# EAGLE board Battery_Block-GiantPanel-v10 (EAGLE 6.6.0), part 1 of 11
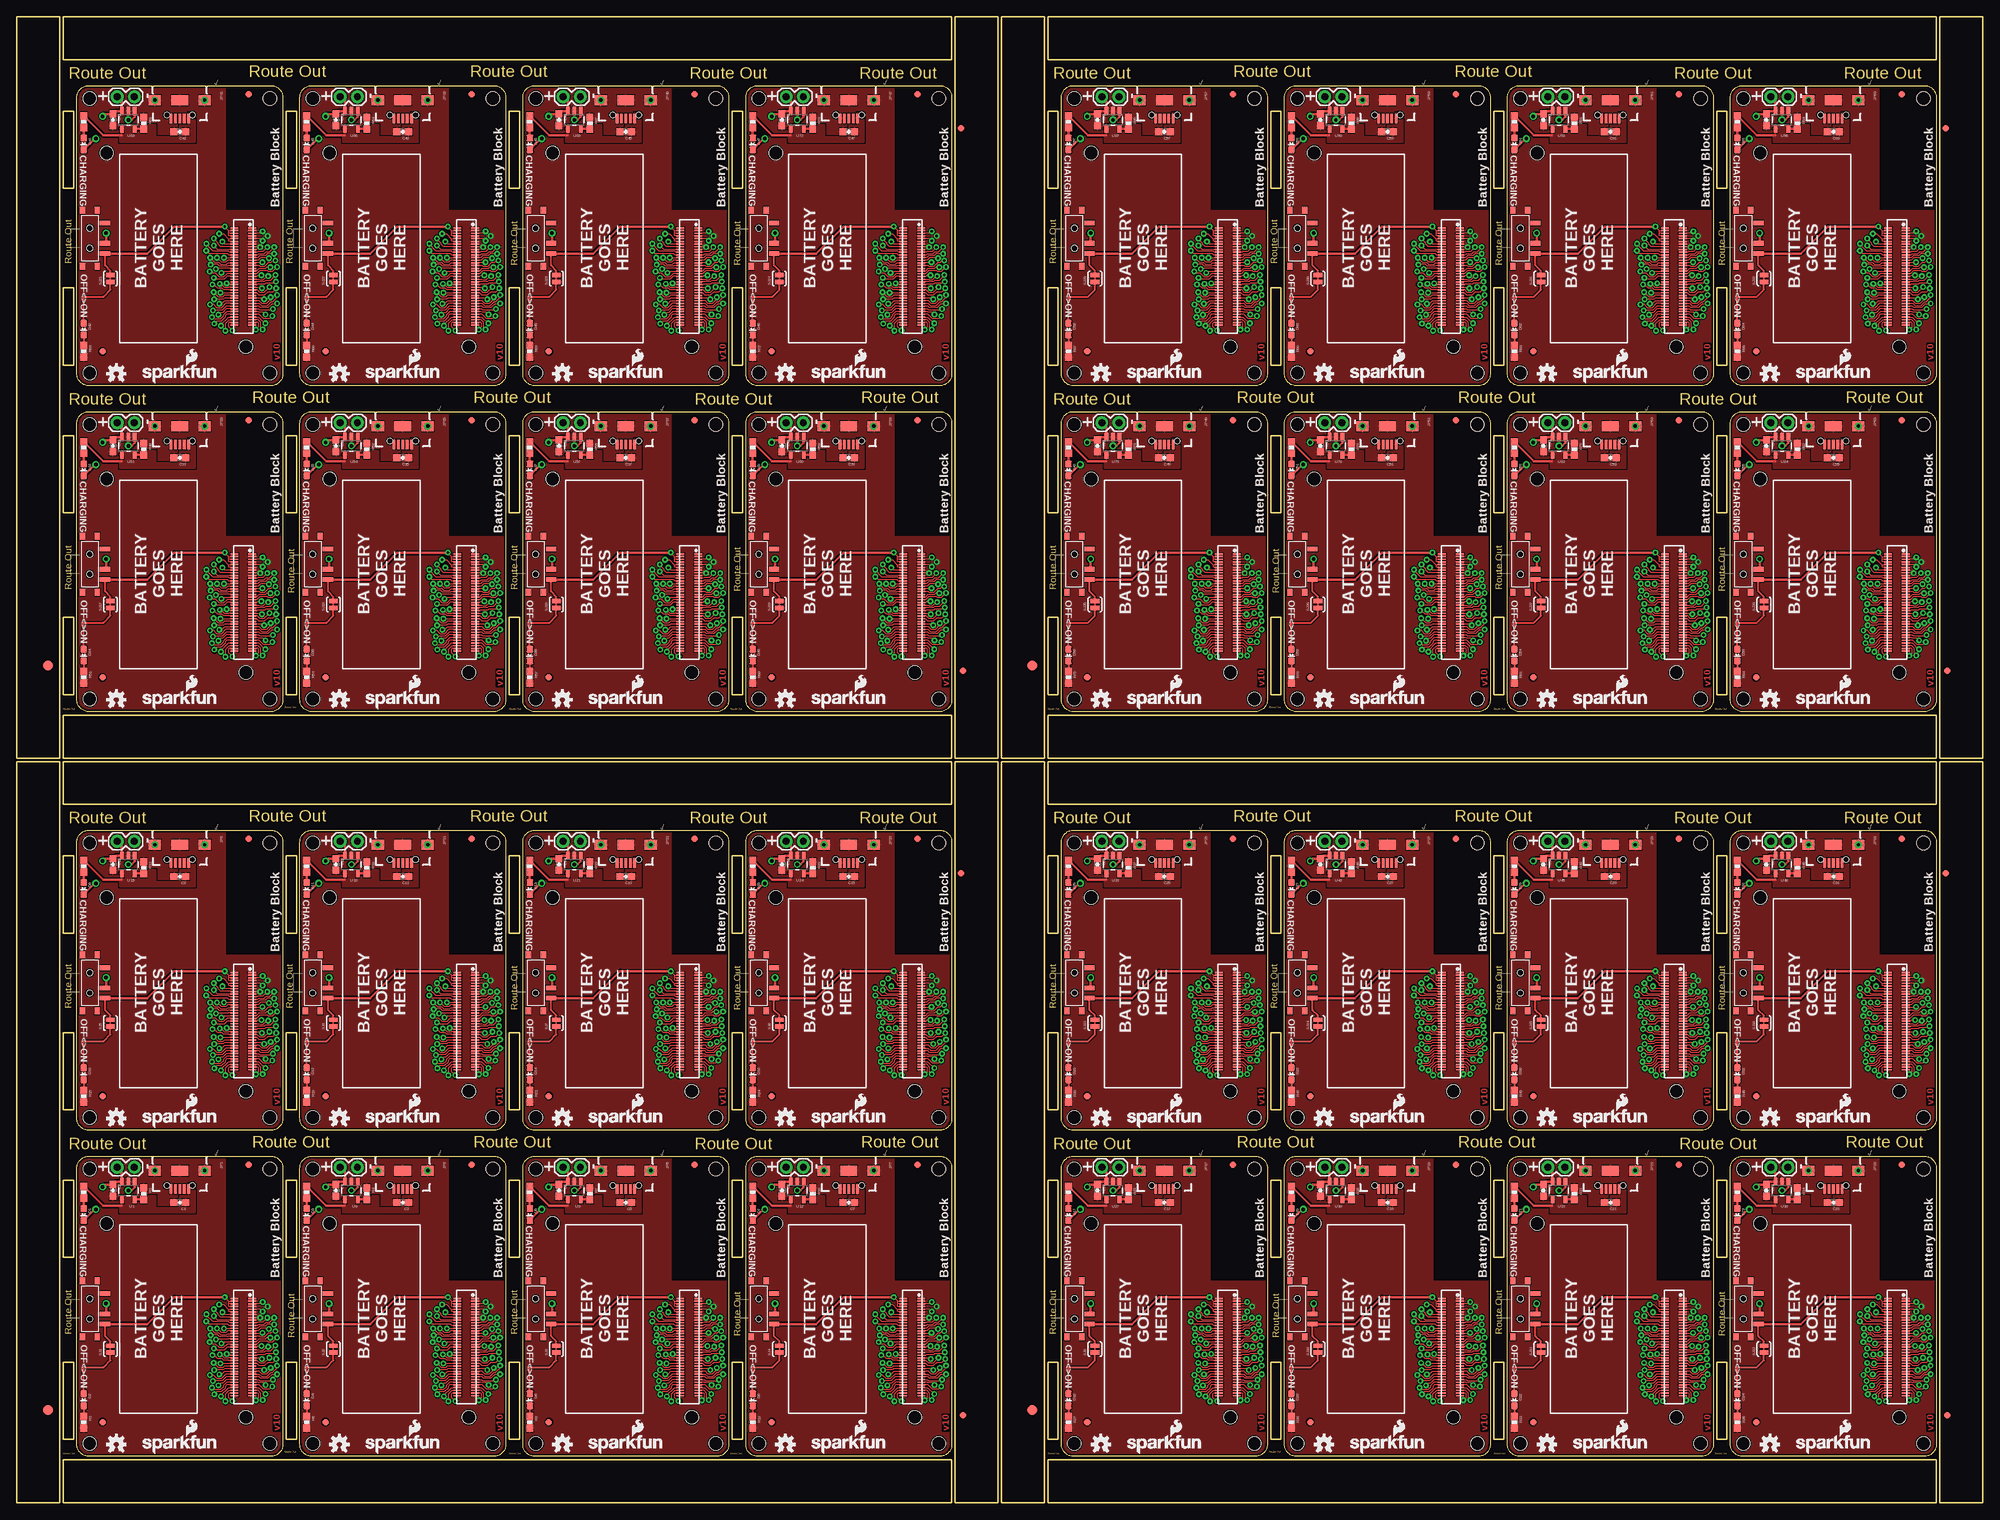
[diagram p0: board, top side]
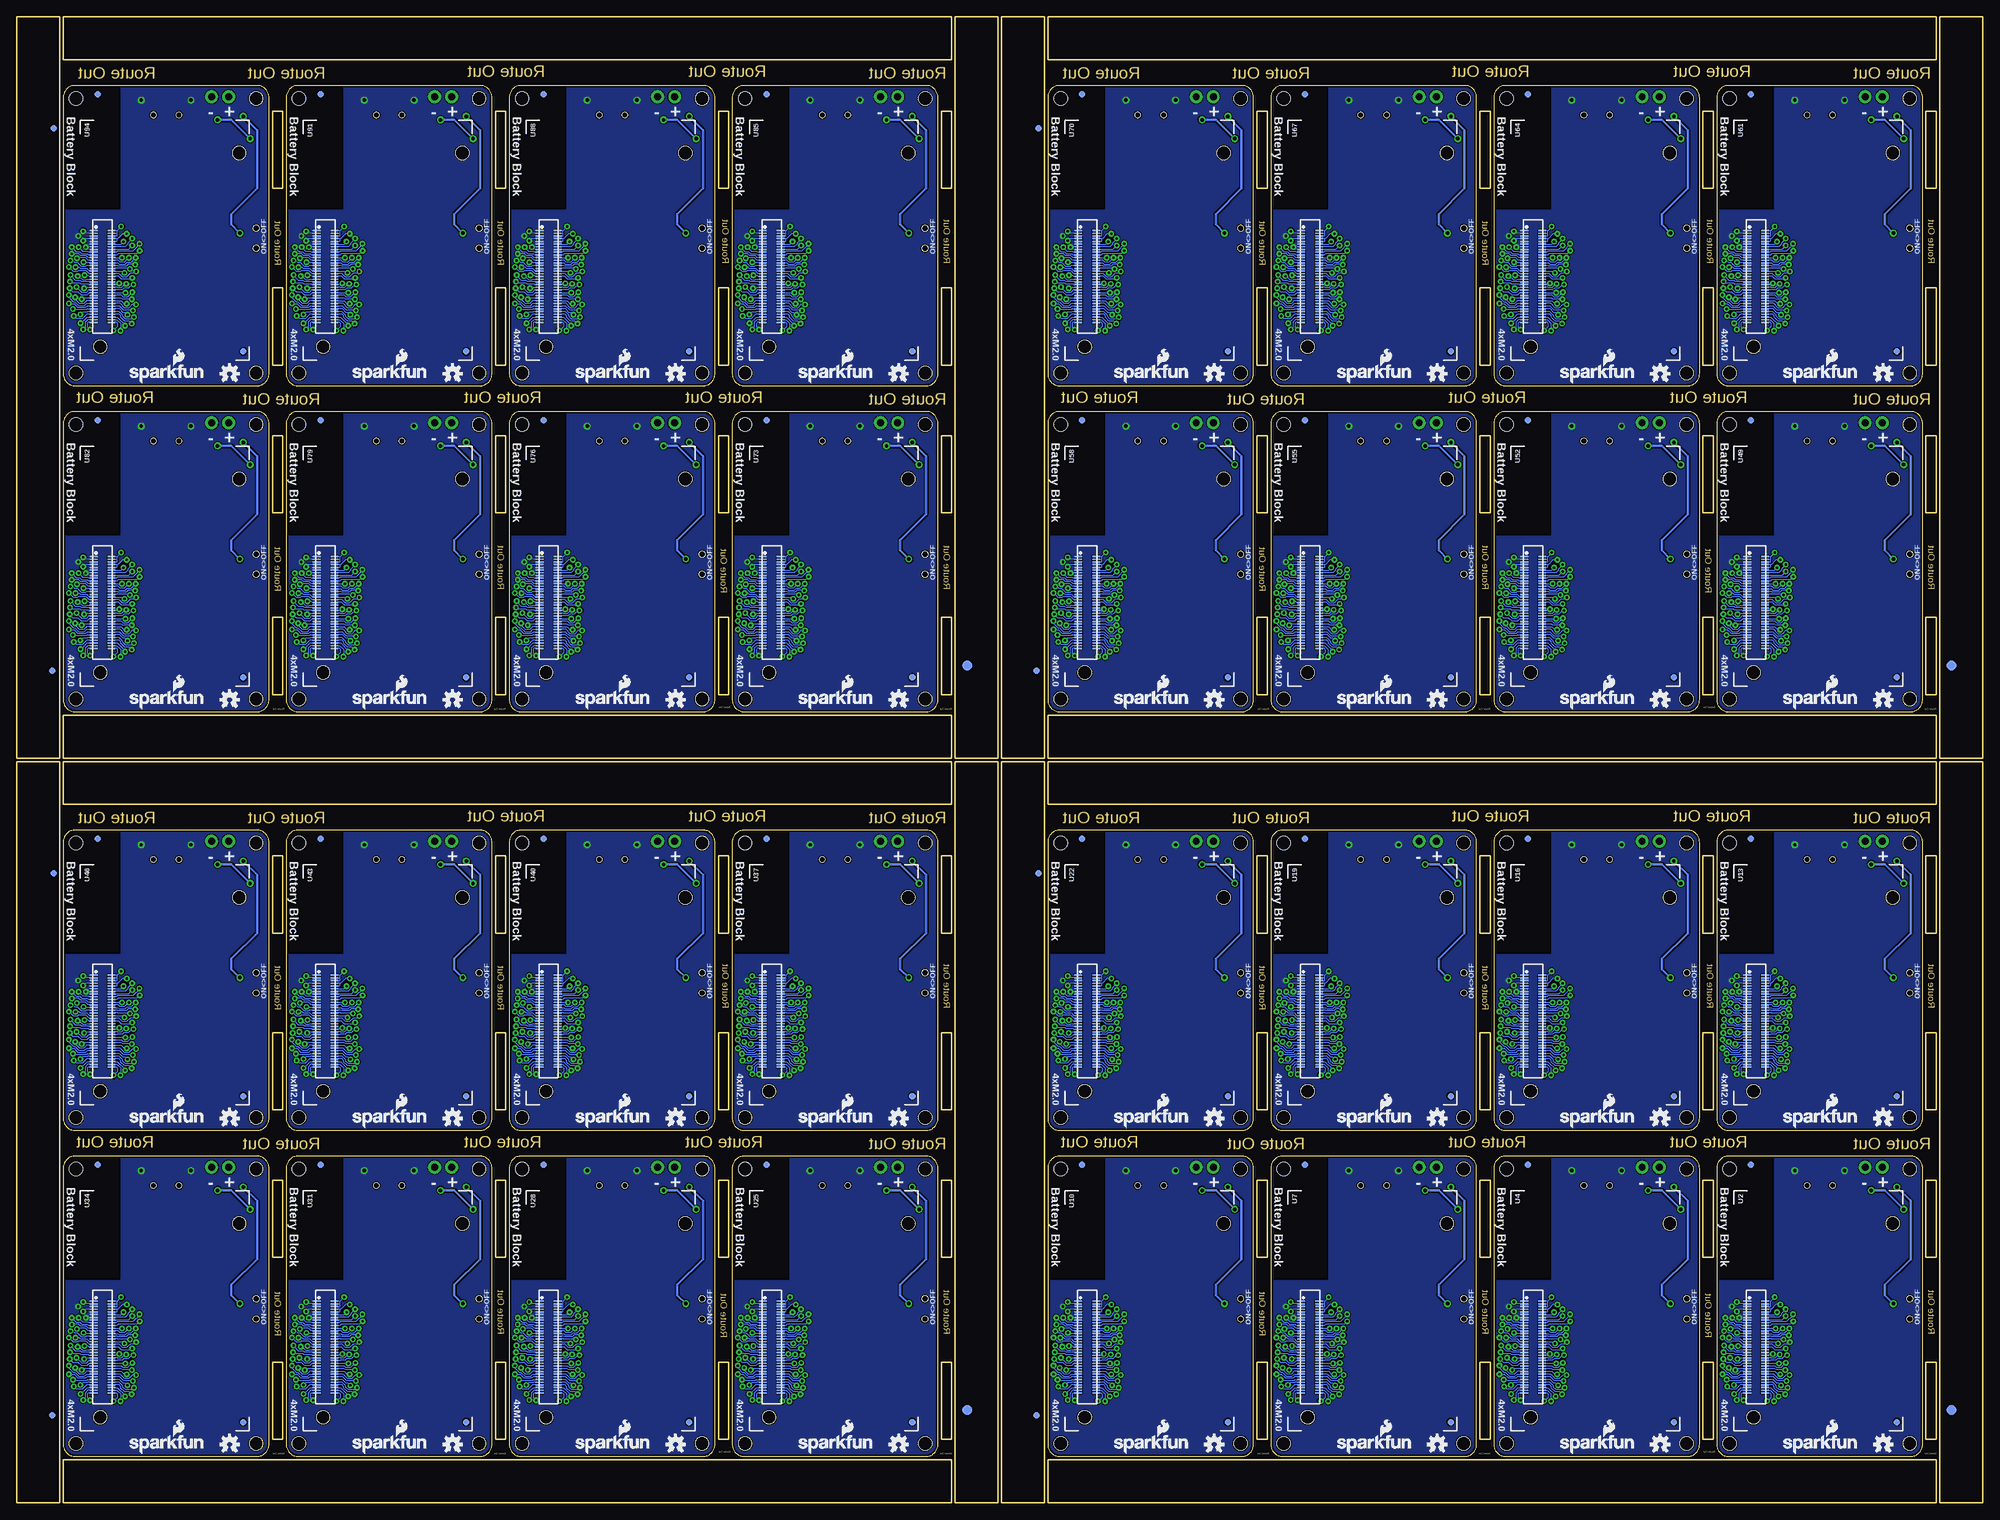
[diagram p1: board, bottom side, seen from below]

Size 291.08 x 219.96 mm. Coordinates in mm from the lower left corner, seen from the top.
Outline: 584 segments
Copper layers (1*16): Top 0.035mm / dielectric 1.5mm / Bottom 0.035mm
Design rules "SparkFun-2-layer *": minimum track width 6mil, minimum drill 13mil, track to track 6mil, track to pad 6mil, pad to pad 6mil, via to via 6mil, smd to smd 6mil, copper to edge 8mil, drill to drill 8mil, minimum pad ring 12mil, minimum via ring 10mil, stop-mask expansion 4mil, vias tented up to drill 20mil, thermal gap 6mil
Holes 2 mm at 37.47,8.76 10.79,8.76 10.79,49.4 37.47,49.4 70.48,8.76 43.81,8.76 43.81,49.4 70.48,49.4 103.5,8.76 76.83,8.76 76.83,49.4 103.5,49.4 136.53,8.76 109.86,8.76 109.86,49.4 136.53,49.4 37.47,57.02 10.79,57.02 10.79,97.66 37.47,97.66 70.48,57.02 43.81,57.02 43.81,97.66 70.48,97.66 103.5,57.02 76.83,57.02 76.83,97.66 103.5,97.66 136.53,57.02 109.86,57.02 109.86,97.66 136.53,97.66 183.26,8.76 156.59,8.76 156.59,49.4 183.26,49.4 216.28,8.76 189.61,8.76 189.61,49.4 216.28,49.4 249.3,8.76 222.63,8.76 222.63,49.4 249.3,49.4 282.32,8.76 255.65,8.76 255.65,49.4 282.32,49.4 183.26,57.02 156.59,57.02 156.59,97.66 183.26,97.66 216.28,57.02 189.61,57.02 189.61,97.66 216.28,97.66 249.3,57.02 222.63,57.02 222.63,97.66 249.3,97.66 282.32,57.02 255.65,57.02 255.65,97.66 282.32,97.66 37.47,119 10.79,119 10.79,159.64 37.47,159.64 70.48,119 43.81,119 43.81,159.64 70.48,159.64 103.5,119 76.83,119 76.83,159.64 103.5,159.64 136.53,119 109.86,119 109.86,159.64 136.53,159.64 37.47,167.26 10.79,167.26 10.79,207.9 37.47,207.9 70.48,167.26 43.81,167.26 43.81,207.9 70.48,207.9 103.5,167.26 76.83,167.26 76.83,207.9 103.5,207.9 136.53,167.26 109.86,167.26 109.86,207.9 136.53,207.9 183.26,119 156.59,119 156.59,159.64 183.26,159.64 216.28,119 189.61,119 189.61,159.64 216.28,159.64 249.3,119 222.63,119 222.63,159.64 249.3,159.64 282.32,119 255.65,119 255.65,159.64 282.32,159.64 183.26,167.26 156.59,167.26 156.59,207.9 183.26,207.9 216.28,167.26 189.61,167.26 189.61,207.9 216.28,207.9 249.3,167.26 222.63,167.26 222.63,207.9 249.3,207.9 282.32,167.26 255.65,167.26 255.65,207.9 282.32,207.9
tRestrict: area 31,33 to 39.4,51.3; area 64,33 to 72.4,51.3; area 97,33 to 105.4,51.3; area 130,33 to 138.4,51.3; area 31,81.3 to 39.4,99.6; area 64,81.3 to 72.4,99.6; area 97,81.3 to 105.4,99.6; area 130,81.3 to 138.4,99.6; area 176.8,33 to 185.2,51.3; area 209.8,33 to 218.2,51.3; area 242.8,33 to 251.2,51.3; area 275.8,33 to 284.2,51.3; 20 more areas
bRestrict: area 31,33 to 39.4,51.3; area 64,33 to 72.4,51.3; area 97,33 to 105.4,51.3; area 130,33 to 138.4,51.3; area 31,81.3 to 39.4,99.6; area 64,81.3 to 72.4,99.6; area 97,81.3 to 105.4,99.6; area 130,81.3 to 138.4,99.6; area 176.8,33 to 185.2,51.3; area 209.8,33 to 218.2,51.3; area 242.8,33 to 251.2,51.3; area 275.8,33 to 284.2,51.3; 20 more areas

## Footprints (pad centres in the part's own frame; a part is rotated, then mirrored left to right if it is on the bottom)
0603-CAP = smd 1.1 x 1: 1 -0.85,0; 2 0.85,0
LED-0603 = smd 1 x 1: A 0,-0.877; C 0,0.877
FIDUCIAL-1.5X3 = smd 1.5 x 1.5: 1 0,0
FIDUCIAL-1X2 = smd 1 x 1: 1 0,0
USB-B-MICRO-SMD_V03 = smd 1.4 x 0.4: D+1 2.7,0; D-1 2.7,0.65; GND1 2.7,-1.3; ID1 2.7,-0.65; VBUS1 2.7,1.3 | smd 1.5 x 1.8: SHIELD1 0,3.7; SHIELD2 0,-3.7 | smd 1.5 x 2.5: SHIELD3 0,0 | hole 0.85: 2.2,1.9; 2.2,-1.9
1X02 = drill 1.016 pad 1.88: 1 0,0; 2 2.54,0
0603-RES = smd 1.1 x 1: 1 -0.85,0; 2 0.85,0
PAD-JUMPER-2-NC_BY_TRACE_YES_SILK = smd 0.635 x 1.27: 1 -0.508,0; 2 0.508,0
KPS-1290 = smd 0.7 x 1.5: O -2.25,2.25; P 0.75,2.25; S 2.25,2.25 | smd 1 x 0.8: P$1 -4.15,1.1; P$2 -4.15,-1.1; P$3 4.15,-1.1; P$4 4.15,1.1 | hole 0.9: -1.5,0; 1.5,0
SOT23-5 = smd 0.55 x 1.2: 1 -0.95,-1.3; 2 0,-1.3; 3 0.95,-1.3; 4 0.95,1.3; 5 -0.95,1.3
EDISON_DAUGHTER = smd 1.14 x 0.2: 1 1.98,19.17; 2 4.62,19.17; 3 1.98,18.77; 4 4.62,18.77; 5 1.98,18.37; 6 4.62,18.37; 7 1.98,17.97; 8 4.62,17.97; 9 1.98,17.57; 10 4.62,17.57; 11 1.98,17.17; 12 4.62,17.17; 13 1.98,16.77; 14 4.62,16.77; 15 1.98,16.37; 16 4.62,16.37; 17 1.98,15.97; 18 4.62,15.97; 19 1.98,15.57; 20 4.62,15.57; 21 1.98,15.17; 22 4.62,15.17; 23 1.98,14.77; 24 4.62,14.77; 25 1.98,14.37; 26 4.62,14.37; 27 1.98,13.97; 28 4.62,13.97; 29 1.98,13.57; 30 4.62,13.57; 31 1.98,13.17; 32 4.62,13.17; 33 1.98,12.77; 34 4.62,12.77; 35 1.98,12.37; 36 4.62,12.37; 37 1.98,11.97; 38 4.62,11.97; 39 1.98,11.57; 40 4.62,11.57; 41 1.98,11.17; 42 4.62,11.17; 43 1.98,10.77; 44 4.62,10.77; 45 1.98,10.37; 46 4.62,10.37; 47 1.98,9.97; 48 4.62,9.97; 49 1.98,9.57; 50 4.62,9.57; 51 1.98,9.17; 52 4.62,9.17; 53 1.98,8.77; 54 4.62,8.77; 55 1.98,8.37; 56 4.62,8.37; 57 1.98,7.97; 58 4.62,7.97; 59 1.98,7.57; 60 4.62,7.57; 61 1.98,7.17; 62 4.62,7.17; 63 1.98,6.77; 64 4.62,6.77; 65 1.98,6.37; 66 4.62,6.37; 67 1.98,5.97; 68 4.62,5.97; 69 1.98,5.57; 70 4.62,5.57 | hole 2: 23.53,30.67; 2.93,1.98
DF40C-70DP-0.4(51) = smd 0.2 x 1.14 bottom: 1 6.8,1.32; 2 6.8,-1.32; 3 6.4,1.32; 4 6.4,-1.32; 5 6,1.32; 6 6,-1.32; 7 5.6,1.32; 8 5.6,-1.32; 9 5.2,1.32; 10 5.2,-1.32; 11 4.8,1.32; 12 4.8,-1.32; 13 4.4,1.32; 14 4.4,-1.32; 15 4,1.32; 16 4,-1.32; 17 3.6,1.32; 18 3.6,-1.32; 19 3.2,1.32; 20 3.2,-1.32; 21 2.8,1.32; 22 2.8,-1.32; 23 2.4,1.32; 24 2.4,-1.32; 25 2,1.32; 26 2,-1.32; 27 1.6,1.32; 28 1.6,-1.32; 29 1.2,1.32; 30 1.2,-1.32; 31 0.8,1.32; 32 0.8,-1.32; 33 0.4,1.32; 34 0.4,-1.32; 35 0,1.32; 36 0,-1.32; 37 -0.4,1.32; 38 -0.4,-1.32; 39 -0.8,1.32; 40 -0.8,-1.32; 41 -1.2,1.32; 42 -1.2,-1.32; 43 -1.6,1.32; 44 -1.6,-1.32; 45 -2,1.32; 46 -2,-1.32; 47 -2.4,1.32; 48 -2.4,-1.32; 49 -2.8,1.32; 50 -2.8,-1.32; 51 -3.2,1.32; 52 -3.2,-1.32; 53 -3.6,1.32; 54 -3.6,-1.32; 55 -4,1.32; 56 -4,-1.32; 57 -4.4,1.32; 58 -4.4,-1.32; 59 -4.8,1.32; 60 -4.8,-1.32; 61 -5.2,1.32; 62 -5.2,-1.32; 63 -5.6,1.32; 64 -5.6,-1.32; 65 -6,1.32; 66 -6,-1.32; 67 -6.4,1.32; 68 -6.4,-1.32; 69 -6.8,1.32; 70 -6.8,-1.32; NC1 7.2,1.32; NC2 7.2,-1.32; NC3 -7.2,-1.32; NC4 -7.2,1.32

## Placement (x,y rotation side)
C1  4.7uF  [0603-CAP]  24.13,44.45 180 top
C2  4.7uF  [0603-CAP]  14.22,46.23 270 top
C3  4.7uF  [0603-CAP]  57.15,44.45 180 top
C4  4.7uF  [0603-CAP]  47.24,46.23 270 top
C5  4.7uF  [0603-CAP]  90.17,44.45 180 top
C6  4.7uF  [0603-CAP]  80.26,46.23 270 top
C7  4.7uF  [0603-CAP]  123.19,44.45 180 top
C8  4.7uF  [0603-CAP]  113.28,46.23 270 top
C9  4.7uF  [0603-CAP]  24.13,92.71 180 top
C10  4.7uF  [0603-CAP]  14.22,94.49 270 top
C11  4.7uF  [0603-CAP]  57.15,92.71 180 top
C12  4.7uF  [0603-CAP]  47.24,94.49 270 top
C13  4.7uF  [0603-CAP]  90.17,92.71 180 top
C14  4.7uF  [0603-CAP]  80.26,94.49 270 top
C15  4.7uF  [0603-CAP]  123.19,92.71 180 top
C16  4.7uF  [0603-CAP]  113.28,94.49 270 top
C17  4.7uF  [0603-CAP]  169.93,44.45 180 top
C18  4.7uF  [0603-CAP]  160.02,46.23 270 top
C19  4.7uF  [0603-CAP]  202.95,44.45 180 top
C20  4.7uF  [0603-CAP]  193.04,46.23 270 top
C21  4.7uF  [0603-CAP]  235.97,44.45 180 top
C22  4.7uF  [0603-CAP]  226.06,46.23 270 top
C23  4.7uF  [0603-CAP]  268.99,44.45 180 top
C24  4.7uF  [0603-CAP]  259.08,46.23 270 top
C25  4.7uF  [0603-CAP]  169.93,92.71 180 top
C26  4.7uF  [0603-CAP]  160.02,94.49 270 top
C27  4.7uF  [0603-CAP]  202.95,92.71 180 top
C28  4.7uF  [0603-CAP]  193.04,94.49 270 top
C29  4.7uF  [0603-CAP]  235.97,92.71 180 top
C30  4.7uF  [0603-CAP]  226.06,94.49 270 top
C31  4.7uF  [0603-CAP]  268.99,92.71 180 top
C32  4.7uF  [0603-CAP]  259.08,94.49 270 top
C33  4.7uF  [0603-CAP]  24.13,154.69 180 top
C34  4.7uF  [0603-CAP]  14.22,156.46 270 top
C35  4.7uF  [0603-CAP]  57.15,154.69 180 top
C36  4.7uF  [0603-CAP]  47.24,156.46 270 top
C37  4.7uF  [0603-CAP]  90.17,154.69 180 top
C38  4.7uF  [0603-CAP]  80.26,156.46 270 top
C39  4.7uF  [0603-CAP]  123.19,154.69 180 top
C40  4.7uF  [0603-CAP]  113.28,156.46 270 top
C41  4.7uF  [0603-CAP]  24.13,202.95 180 top
C42  4.7uF  [0603-CAP]  14.22,204.72 270 top
C43  4.7uF  [0603-CAP]  57.15,202.95 180 top
C44  4.7uF  [0603-CAP]  47.24,204.72 270 top
C45  4.7uF  [0603-CAP]  90.17,202.95 180 top
C46  4.7uF  [0603-CAP]  80.26,204.72 270 top
C47  4.7uF  [0603-CAP]  123.19,202.95 180 top
C48  4.7uF  [0603-CAP]  113.28,204.72 270 top
C49  4.7uF  [0603-CAP]  169.93,154.69 180 top
C50  4.7uF  [0603-CAP]  160.02,156.46 270 top
C51  4.7uF  [0603-CAP]  202.95,154.69 180 top
C52  4.7uF  [0603-CAP]  193.04,156.46 270 top
C53  4.7uF  [0603-CAP]  235.97,154.69 180 top
C54  4.7uF  [0603-CAP]  226.06,156.46 270 top
C55  4.7uF  [0603-CAP]  268.99,154.69 180 top
C56  4.7uF  [0603-CAP]  259.08,156.46 270 top
C57  4.7uF  [0603-CAP]  169.93,202.95 180 top
C58  4.7uF  [0603-CAP]  160.02,204.72 270 top
C59  4.7uF  [0603-CAP]  202.95,202.95 180 top
C60  4.7uF  [0603-CAP]  193.04,204.72 270 top
C61  4.7uF  [0603-CAP]  235.97,202.95 180 top
C62  4.7uF  [0603-CAP]  226.06,204.72 270 top
C63  4.7uF  [0603-CAP]  268.99,202.95 180 top
C64  4.7uF  [0603-CAP]  259.08,204.72 270 top
D1  RED  [LED-0603]  9.91,42.67 180 top
D2  BLUE  [LED-0603]  9.91,15.24 180 top
D3  RED  [LED-0603]  42.93,42.67 180 top
D4  BLUE  [LED-0603]  42.93,15.24 180 top
D5  RED  [LED-0603]  75.95,42.67 180 top
D6  BLUE  [LED-0603]  75.95,15.24 180 top
D7  RED  [LED-0603]  108.97,42.67 180 top
D8  BLUE  [LED-0603]  108.97,15.24 180 top
D9  RED  [LED-0603]  9.91,90.93 180 top
D10  BLUE  [LED-0603]  9.91,63.5 180 top
D11  RED  [LED-0603]  42.93,90.93 180 top
D12  BLUE  [LED-0603]  42.93,63.5 180 top
D13  RED  [LED-0603]  75.95,90.93 180 top
D14  BLUE  [LED-0603]  75.95,63.5 180 top
D15  RED  [LED-0603]  108.97,90.93 180 top
D16  BLUE  [LED-0603]  108.97,63.5 180 top
D17  RED  [LED-0603]  155.7,42.67 180 top
D18  BLUE  [LED-0603]  155.7,15.24 180 top
D19  RED  [LED-0603]  188.72,42.67 180 top
D20  BLUE  [LED-0603]  188.72,15.24 180 top
D21  RED  [LED-0603]  221.74,42.67 180 top
D22  BLUE  [LED-0603]  221.74,15.24 180 top
D23  RED  [LED-0603]  254.76,42.67 180 top
D24  BLUE  [LED-0603]  254.76,15.24 180 top
D25  RED  [LED-0603]  155.7,90.93 180 top
D26  BLUE  [LED-0603]  155.7,63.5 180 top
D27  RED  [LED-0603]  188.72,90.93 180 top
D28  BLUE  [LED-0603]  188.72,63.5 180 top
D29  RED  [LED-0603]  221.74,90.93 180 top
D30  BLUE  [LED-0603]  221.74,63.5 180 top
D31  RED  [LED-0603]  254.76,90.93 180 top
D32  BLUE  [LED-0603]  254.76,63.5 180 top
D33  RED  [LED-0603]  9.91,152.91 180 top
D34  BLUE  [LED-0603]  9.91,125.48 180 top
D35  RED  [LED-0603]  42.93,152.91 180 top
D36  BLUE  [LED-0603]  42.93,125.48 180 top
D37  RED  [LED-0603]  75.95,152.91 180 top
D38  BLUE  [LED-0603]  75.95,125.48 180 top
D39  RED  [LED-0603]  108.97,152.91 180 top
D40  BLUE  [LED-0603]  108.97,125.48 180 top
D41  RED  [LED-0603]  9.91,201.17 180 top
D42  BLUE  [LED-0603]  9.91,173.74 180 top
D43  RED  [LED-0603]  42.93,201.17 180 top
D44  BLUE  [LED-0603]  42.93,173.74 180 top
D45  RED  [LED-0603]  75.95,201.17 180 top
D46  BLUE  [LED-0603]  75.95,173.74 180 top
D47  RED  [LED-0603]  108.97,201.17 180 top
D48  BLUE  [LED-0603]  108.97,173.74 180 top
D49  RED  [LED-0603]  155.7,152.91 180 top
D50  BLUE  [LED-0603]  155.7,125.48 180 top
D51  RED  [LED-0603]  188.72,152.91 180 top
D52  BLUE  [LED-0603]  188.72,125.48 180 top
D53  RED  [LED-0603]  221.74,152.91 180 top
D54  BLUE  [LED-0603]  221.74,125.48 180 top
D55  RED  [LED-0603]  254.76,152.91 180 top
D56  BLUE  [LED-0603]  254.76,125.48 180 top
D57  RED  [LED-0603]  155.7,201.17 180 top
D58  BLUE  [LED-0603]  155.7,173.74 180 top
D59  RED  [LED-0603]  188.72,201.17 180 top
D60  BLUE  [LED-0603]  188.72,173.74 180 top
D61  RED  [LED-0603]  221.74,201.17 180 top
D62  BLUE  [LED-0603]  221.74,173.74 180 top
D63  RED  [LED-0603]  254.76,201.17 180 top
D64  BLUE  [LED-0603]  254.76,173.74 180 top
E$1  [FIDUCIAL-1.5X3]  4.57,13.72 0 top
E$2  [FIDUCIAL-1.5X3]  4.57,13.72 0 bottom
E$3  [FIDUCIAL-1X2]  140.08,12.95 0 bottom
E$4  [FIDUCIAL-1X2]  140.08,12.95 0 top
E$5  [FIDUCIAL-1X2]  139.83,93.22 180 top
E$6  [FIDUCIAL-1X2]  139.83,93.22 180 bottom
E$7  [FIDUCIAL-1X2]  285.88,12.95 0 top
E$8  [FIDUCIAL-1X2]  285.62,93.22 180 top
E$9  [FIDUCIAL-1.5X3]  150.37,13.72 0 top
E$10  [FIDUCIAL-1.5X3]  150.37,13.72 0 bottom
E$11  [FIDUCIAL-1X2]  285.88,12.95 0 bottom
E$12  [FIDUCIAL-1X2]  285.62,93.22 180 bottom
E$13  [FIDUCIAL-1X2]  140.08,123.19 0 top
E$14  [FIDUCIAL-1X2]  139.83,203.45 180 top
E$15  [FIDUCIAL-1.5X3]  4.57,123.95 0 top
E$16  [FIDUCIAL-1.5X3]  4.57,123.95 0 bottom
E$17  [FIDUCIAL-1X2]  140.08,123.19 0 bottom
E$18  [FIDUCIAL-1X2]  139.83,203.45 180 bottom
E$19  [FIDUCIAL-1X2]  285.88,123.19 0 top
E$20  [FIDUCIAL-1X2]  285.62,203.45 180 top
E$21  [FIDUCIAL-1.5X3]  150.37,123.95 0 top
E$22  [FIDUCIAL-1.5X3]  150.37,123.95 0 bottom
E$23  [FIDUCIAL-1X2]  285.88,123.19 0 bottom
E$24  [FIDUCIAL-1X2]  285.62,203.45 180 bottom
FID1  FIDUCIAL1X2  [FIDUCIAL-1X2]  12.7,11.94 0 top
FID2  FIDUCIAL1X2  [FIDUCIAL-1X2]  34.29,50.04 0 top
FID3  FIDUCIAL1X2  [FIDUCIAL-1X2]  12.7,11.94 0 bottom
FID4  FIDUCIAL1X2  [FIDUCIAL-1X2]  34.29,50.04 0 bottom
FID5  FIDUCIAL1X2  [FIDUCIAL-1X2]  45.72,11.94 0 top
FID6  FIDUCIAL1X2  [FIDUCIAL-1X2]  67.31,50.04 0 top
FID7  FIDUCIAL1X2  [FIDUCIAL-1X2]  45.72,11.94 0 bottom
FID8  FIDUCIAL1X2  [FIDUCIAL-1X2]  67.31,50.04 0 bottom
FID9  FIDUCIAL1X2  [FIDUCIAL-1X2]  78.74,11.94 0 top
FID10  FIDUCIAL1X2  [FIDUCIAL-1X2]  100.33,50.04 0 top
FID11  FIDUCIAL1X2  [FIDUCIAL-1X2]  78.74,11.94 0 bottom
FID12  FIDUCIAL1X2  [FIDUCIAL-1X2]  100.33,50.04 0 bottom
FID13  FIDUCIAL1X2  [FIDUCIAL-1X2]  111.76,11.94 0 top
FID14  FIDUCIAL1X2  [FIDUCIAL-1X2]  133.35,50.04 0 top
FID15  FIDUCIAL1X2  [FIDUCIAL-1X2]  111.76,11.94 0 bottom
FID16  FIDUCIAL1X2  [FIDUCIAL-1X2]  133.35,50.04 0 bottom
FID17  FIDUCIAL1X2  [FIDUCIAL-1X2]  12.7,60.2 0 top
FID18  FIDUCIAL1X2  [FIDUCIAL-1X2]  34.29,98.3 0 top
FID19  FIDUCIAL1X2  [FIDUCIAL-1X2]  12.7,60.2 0 bottom
FID20  FIDUCIAL1X2  [FIDUCIAL-1X2]  34.29,98.3 0 bottom
FID21  FIDUCIAL1X2  [FIDUCIAL-1X2]  45.72,60.2 0 top
FID22  FIDUCIAL1X2  [FIDUCIAL-1X2]  67.31,98.3 0 top
FID23  FIDUCIAL1X2  [FIDUCIAL-1X2]  45.72,60.2 0 bottom
FID24  FIDUCIAL1X2  [FIDUCIAL-1X2]  67.31,98.3 0 bottom
FID25  FIDUCIAL1X2  [FIDUCIAL-1X2]  78.74,60.2 0 top
FID26  FIDUCIAL1X2  [FIDUCIAL-1X2]  100.33,98.3 0 top
FID27  FIDUCIAL1X2  [FIDUCIAL-1X2]  78.74,60.2 0 bottom
FID28  FIDUCIAL1X2  [FIDUCIAL-1X2]  100.33,98.3 0 bottom
FID29  FIDUCIAL1X2  [FIDUCIAL-1X2]  111.76,60.2 0 top
FID30  FIDUCIAL1X2  [FIDUCIAL-1X2]  133.35,98.3 0 top
FID31  FIDUCIAL1X2  [FIDUCIAL-1X2]  111.76,60.2 0 bottom
FID32  FIDUCIAL1X2  [FIDUCIAL-1X2]  133.35,98.3 0 bottom
FID33  FIDUCIAL1X2  [FIDUCIAL-1X2]  158.5,11.94 0 top
FID34  FIDUCIAL1X2  [FIDUCIAL-1X2]  180.09,50.04 0 top
FID35  FIDUCIAL1X2  [FIDUCIAL-1X2]  158.5,11.94 0 bottom
FID36  FIDUCIAL1X2  [FIDUCIAL-1X2]  180.09,50.04 0 bottom
FID37  FIDUCIAL1X2  [FIDUCIAL-1X2]  191.52,11.94 0 top
FID38  FIDUCIAL1X2  [FIDUCIAL-1X2]  213.11,50.04 0 top
FID39  FIDUCIAL1X2  [FIDUCIAL-1X2]  191.52,11.94 0 bottom
FID40  FIDUCIAL1X2  [FIDUCIAL-1X2]  213.11,50.04 0 bottom
FID41  FIDUCIAL1X2  [FIDUCIAL-1X2]  224.54,11.94 0 top
FID42  FIDUCIAL1X2  [FIDUCIAL-1X2]  246.13,50.04 0 top
FID43  FIDUCIAL1X2  [FIDUCIAL-1X2]  224.54,11.94 0 bottom
FID44  FIDUCIAL1X2  [FIDUCIAL-1X2]  246.13,50.04 0 bottom
FID45  FIDUCIAL1X2  [FIDUCIAL-1X2]  257.56,11.94 0 top
FID46  FIDUCIAL1X2  [FIDUCIAL-1X2]  279.15,50.04 0 top
FID47  FIDUCIAL1X2  [FIDUCIAL-1X2]  257.56,11.94 0 bottom
FID48  FIDUCIAL1X2  [FIDUCIAL-1X2]  279.15,50.04 0 bottom
FID49  FIDUCIAL1X2  [FIDUCIAL-1X2]  158.5,60.2 0 top
FID50  FIDUCIAL1X2  [FIDUCIAL-1X2]  180.09,98.3 0 top
FID51  FIDUCIAL1X2  [FIDUCIAL-1X2]  158.5,60.2 0 bottom
FID52  FIDUCIAL1X2  [FIDUCIAL-1X2]  180.09,98.3 0 bottom
FID53  FIDUCIAL1X2  [FIDUCIAL-1X2]  191.52,60.2 0 top
FID54  FIDUCIAL1X2  [FIDUCIAL-1X2]  213.11,98.3 0 top
FID55  FIDUCIAL1X2  [FIDUCIAL-1X2]  191.52,60.2 0 bottom
FID56  FIDUCIAL1X2  [FIDUCIAL-1X2]  213.11,98.3 0 bottom
FID57  FIDUCIAL1X2  [FIDUCIAL-1X2]  224.54,60.2 0 top
FID58  FIDUCIAL1X2  [FIDUCIAL-1X2]  246.13,98.3 0 top
FID59  FIDUCIAL1X2  [FIDUCIAL-1X2]  224.54,60.2 0 bottom
FID60  FIDUCIAL1X2  [FIDUCIAL-1X2]  246.13,98.3 0 bottom
FID61  FIDUCIAL1X2  [FIDUCIAL-1X2]  257.56,60.2 0 top
FID62  FIDUCIAL1X2  [FIDUCIAL-1X2]  279.15,98.3 0 top
FID63  FIDUCIAL1X2  [FIDUCIAL-1X2]  257.56,60.2 0 bottom
FID64  FIDUCIAL1X2  [FIDUCIAL-1X2]  279.15,98.3 0 bottom
FID65  FIDUCIAL1X2  [FIDUCIAL-1X2]  12.7,122.17 0 top
FID66  FIDUCIAL1X2  [FIDUCIAL-1X2]  34.29,160.27 0 top
FID67  FIDUCIAL1X2  [FIDUCIAL-1X2]  12.7,122.17 0 bottom
FID68  FIDUCIAL1X2  [FIDUCIAL-1X2]  34.29,160.27 0 bottom
FID69  FIDUCIAL1X2  [FIDUCIAL-1X2]  45.72,122.17 0 top
FID70  FIDUCIAL1X2  [FIDUCIAL-1X2]  67.31,160.27 0 top
FID71  FIDUCIAL1X2  [FIDUCIAL-1X2]  45.72,122.17 0 bottom
FID72  FIDUCIAL1X2  [FIDUCIAL-1X2]  67.31,160.27 0 bottom
FID73  FIDUCIAL1X2  [FIDUCIAL-1X2]  78.74,122.17 0 top
FID74  FIDUCIAL1X2  [FIDUCIAL-1X2]  100.33,160.27 0 top
FID75  FIDUCIAL1X2  [FIDUCIAL-1X2]  78.74,122.17 0 bottom
FID76  FIDUCIAL1X2  [FIDUCIAL-1X2]  100.33,160.27 0 bottom
FID77  FIDUCIAL1X2  [FIDUCIAL-1X2]  111.76,122.17 0 top
FID78  FIDUCIAL1X2  [FIDUCIAL-1X2]  133.35,160.27 0 top
FID79  FIDUCIAL1X2  [FIDUCIAL-1X2]  111.76,122.17 0 bottom
FID80  FIDUCIAL1X2  [FIDUCIAL-1X2]  133.35,160.27 0 bottom
FID81  FIDUCIAL1X2  [FIDUCIAL-1X2]  12.7,170.43 0 top
FID82  FIDUCIAL1X2  [FIDUCIAL-1X2]  34.29,208.53 0 top
FID83  FIDUCIAL1X2  [FIDUCIAL-1X2]  12.7,170.43 0 bottom
FID84  FIDUCIAL1X2  [FIDUCIAL-1X2]  34.29,208.53 0 bottom
FID85  FIDUCIAL1X2  [FIDUCIAL-1X2]  45.72,170.43 0 top
FID86  FIDUCIAL1X2  [FIDUCIAL-1X2]  67.31,208.53 0 top
FID87  FIDUCIAL1X2  [FIDUCIAL-1X2]  45.72,170.43 0 bottom
FID88  FIDUCIAL1X2  [FIDUCIAL-1X2]  67.31,208.53 0 bottom
FID89  FIDUCIAL1X2  [FIDUCIAL-1X2]  78.74,170.43 0 top
FID90  FIDUCIAL1X2  [FIDUCIAL-1X2]  100.33,208.53 0 top
FID91  FIDUCIAL1X2  [FIDUCIAL-1X2]  78.74,170.43 0 bottom
FID92  FIDUCIAL1X2  [FIDUCIAL-1X2]  100.33,208.53 0 bottom
FID93  FIDUCIAL1X2  [FIDUCIAL-1X2]  111.76,170.43 0 top
FID94  FIDUCIAL1X2  [FIDUCIAL-1X2]  133.35,208.53 0 top
FID95  FIDUCIAL1X2  [FIDUCIAL-1X2]  111.76,170.43 0 bottom
FID96  FIDUCIAL1X2  [FIDUCIAL-1X2]  133.35,208.53 0 bottom
FID97  FIDUCIAL1X2  [FIDUCIAL-1X2]  158.5,122.17 0 top
FID98  FIDUCIAL1X2  [FIDUCIAL-1X2]  180.09,160.27 0 top
FID99  FIDUCIAL1X2  [FIDUCIAL-1X2]  158.5,122.17 0 bottom
FID100  FIDUCIAL1X2  [FIDUCIAL-1X2]  180.09,160.27 0 bottom
FID101  FIDUCIAL1X2  [FIDUCIAL-1X2]  191.52,122.17 0 top
FID102  FIDUCIAL1X2  [FIDUCIAL-1X2]  213.11,160.27 0 top
FID103  FIDUCIAL1X2  [FIDUCIAL-1X2]  191.52,122.17 0 bottom
FID104  FIDUCIAL1X2  [FIDUCIAL-1X2]  213.11,160.27 0 bottom
FID105  FIDUCIAL1X2  [FIDUCIAL-1X2]  224.54,122.17 0 top
FID106  FIDUCIAL1X2  [FIDUCIAL-1X2]  246.13,160.27 0 top
FID107  FIDUCIAL1X2  [FIDUCIAL-1X2]  224.54,122.17 0 bottom
FID108  FIDUCIAL1X2  [FIDUCIAL-1X2]  246.13,160.27 0 bottom
FID109  FIDUCIAL1X2  [FIDUCIAL-1X2]  257.56,122.17 0 top
FID110  FIDUCIAL1X2  [FIDUCIAL-1X2]  279.15,160.27 0 top
FID111  FIDUCIAL1X2  [FIDUCIAL-1X2]  257.56,122.17 0 bottom
FID112  FIDUCIAL1X2  [FIDUCIAL-1X2]  279.15,160.27 0 bottom
FID113  FIDUCIAL1X2  [FIDUCIAL-1X2]  158.5,170.43 0 top
FID114  FIDUCIAL1X2  [FIDUCIAL-1X2]  180.09,208.53 0 top
FID115  FIDUCIAL1X2  [FIDUCIAL-1X2]  158.5,170.43 0 bottom
FID116  FIDUCIAL1X2  [FIDUCIAL-1X2]  180.09,208.53 0 bottom
FID117  FIDUCIAL1X2  [FIDUCIAL-1X2]  191.52,170.43 0 top
FID118  FIDUCIAL1X2  [FIDUCIAL-1X2]  213.11,208.53 0 top
FID119  FIDUCIAL1X2  [FIDUCIAL-1X2]  191.52,170.43 0 bottom
FID120  FIDUCIAL1X2  [FIDUCIAL-1X2]  213.11,208.53 0 bottom
FID121  FIDUCIAL1X2  [FIDUCIAL-1X2]  224.54,170.43 0 top
FID122  FIDUCIAL1X2  [FIDUCIAL-1X2]  246.13,208.53 0 top
FID123  FIDUCIAL1X2  [FIDUCIAL-1X2]  224.54,170.43 0 bottom
FID124  FIDUCIAL1X2  [FIDUCIAL-1X2]  246.13,208.53 0 bottom
FID125  FIDUCIAL1X2  [FIDUCIAL-1X2]  257.56,170.43 0 top
FID126  FIDUCIAL1X2  [FIDUCIAL-1X2]  279.15,208.53 0 top
FID127  FIDUCIAL1X2  [FIDUCIAL-1X2]  257.56,170.43 0 bottom
FID128  FIDUCIAL1X2  [FIDUCIAL-1X2]  279.15,208.53 0 bottom
JP1  USB_MICROB_PLUG  [USB-B-MICRO-SMD_V03]  24.13,49.15 270 top
JP2  USB_MICROB_PLUG  [USB-B-MICRO-SMD_V03]  57.15,49.15 270 top
JP3  M02PTH  [1X02]  14.86,49.66 0 top
JP4  M02PTH  [1X02]  47.88,49.66 0 top
JP5  USB_MICROB_PLUG  [USB-B-MICRO-SMD_V03]  90.17,49.15 270 top
JP6  M02PTH  [1X02]  80.9,49.66 0 top
JP7  USB_MICROB_PLUG  [USB-B-MICRO-SMD_V03]  123.19,49.15 270 top
JP8  M02PTH  [1X02]  113.92,49.66 0 top
JP9  USB_MICROB_PLUG  [USB-B-MICRO-SMD_V03]  24.13,97.41 270 top
JP10  M02PTH  [1X02]  14.86,97.92 0 top
JP11  USB_MICROB_PLUG  [USB-B-MICRO-SMD_V03]  57.15,97.41 270 top
JP12  M02PTH  [1X02]  47.88,97.92 0 top
JP13  USB_MICROB_PLUG  [USB-B-MICRO-SMD_V03]  90.17,97.41 270 top
JP14  M02PTH  [1X02]  80.9,97.92 0 top
JP15  USB_MICROB_PLUG  [USB-B-MICRO-SMD_V03]  123.19,97.41 270 top
JP16  M02PTH  [1X02]  113.92,97.92 0 top
JP17  USB_MICROB_PLUG  [USB-B-MICRO-SMD_V03]  169.93,49.15 270 top
JP18  M02PTH  [1X02]  160.66,49.66 0 top
JP19  USB_MICROB_PLUG  [USB-B-MICRO-SMD_V03]  202.95,49.15 270 top
JP20  M02PTH  [1X02]  193.68,49.66 0 top
JP21  USB_MICROB_PLUG  [USB-B-MICRO-SMD_V03]  235.97,49.15 270 top
JP22  M02PTH  [1X02]  226.69,49.66 0 top
JP23  USB_MICROB_PLUG  [USB-B-MICRO-SMD_V03]  268.99,49.15 270 top
JP24  M02PTH  [1X02]  259.71,49.66 0 top
JP25  USB_MICROB_PLUG  [USB-B-MICRO-SMD_V03]  169.93,97.41 270 top
JP26  M02PTH  [1X02]  160.66,97.92 0 top
JP27  USB_MICROB_PLUG  [USB-B-MICRO-SMD_V03]  202.95,97.41 270 top
JP28  M02PTH  [1X02]  193.68,97.92 0 top
JP29  USB_MICROB_PLUG  [USB-B-MICRO-SMD_V03]  235.97,97.41 270 top
JP30  M02PTH  [1X02]  226.69,97.92 0 top
JP31  USB_MICROB_PLUG  [USB-B-MICRO-SMD_V03]  268.99,97.41 270 top
JP32  M02PTH  [1X02]  259.71,97.92 0 top
JP33  USB_MICROB_PLUG  [USB-B-MICRO-SMD_V03]  24.13,159.38 270 top
JP34  M02PTH  [1X02]  14.86,159.89 0 top
JP35  USB_MICROB_PLUG  [USB-B-MICRO-SMD_V03]  57.15,159.38 270 top
JP36  M02PTH  [1X02]  47.88,159.89 0 top
JP37  USB_MICROB_PLUG  [USB-B-MICRO-SMD_V03]  90.17,159.38 270 top
JP38  M02PTH  [1X02]  80.9,159.89 0 top
JP39  USB_MICROB_PLUG  [USB-B-MICRO-SMD_V03]  123.19,159.38 270 top
JP40  M02PTH  [1X02]  113.92,159.89 0 top
JP41  USB_MICROB_PLUG  [USB-B-MICRO-SMD_V03]  24.13,207.65 270 top
JP42  M02PTH  [1X02]  14.86,208.15 0 top
JP43  USB_MICROB_PLUG  [USB-B-MICRO-SMD_V03]  57.15,207.65 270 top
JP44  M02PTH  [1X02]  47.88,208.15 0 top
JP45  USB_MICROB_PLUG  [USB-B-MICRO-SMD_V03]  90.17,207.65 270 top
JP46  M02PTH  [1X02]  80.9,208.15 0 top
JP47  USB_MICROB_PLUG  [USB-B-MICRO-SMD_V03]  123.19,207.65 270 top
JP48  M02PTH  [1X02]  113.92,208.15 0 top
JP49  USB_MICROB_PLUG  [USB-B-MICRO-SMD_V03]  169.93,159.38 270 top
JP50  M02PTH  [1X02]  160.66,159.89 0 top
JP51  USB_MICROB_PLUG  [USB-B-MICRO-SMD_V03]  202.95,159.38 270 top
JP52  M02PTH  [1X02]  193.68,159.89 0 top
JP53  USB_MICROB_PLUG  [USB-B-MICRO-SMD_V03]  235.97,159.38 270 top
JP54  M02PTH  [1X02]  226.69,159.89 0 top
JP55  USB_MICROB_PLUG  [USB-B-MICRO-SMD_V03]  268.99,159.38 270 top
JP56  M02PTH  [1X02]  259.71,159.89 0 top
JP57  USB_MICROB_PLUG  [USB-B-MICRO-SMD_V03]  169.93,207.65 270 top
JP58  M02PTH  [1X02]  160.66,208.15 0 top
JP59  USB_MICROB_PLUG  [USB-B-MICRO-SMD_V03]  202.95,207.65 270 top
JP60  M02PTH  [1X02]  193.68,208.15 0 top
JP61  USB_MICROB_PLUG  [USB-B-MICRO-SMD_V03]  235.97,207.65 270 top
JP62  M02PTH  [1X02]  226.69,208.15 0 top
JP63  USB_MICROB_PLUG  [USB-B-MICRO-SMD_V03]  268.99,207.65 270 top
JP64  M02PTH  [1X02]  259.71,208.15 0 top
LOGO1  OSHW-LOGOS  [OSHW-LOGO-S]  14.73,8.64 0 top
LOGO2  OSHW-LOGOS  [OSHW-LOGO-S]  14.73,8.64 0 bottom
LOGO3  SFE_LOGO_NAME_FLAME.1_INCH  [SFE_LOGO_NAME_FLAME_.1]  29.97,7.11 0 bottom
LOGO4  SFE_LOGO_NAME_FLAME.1_INCH  [SFE_LOGO_NAME_FLAME_.1]  18.19,7.11 0 top
LOGO5  OSHW-LOGOS  [OSHW-LOGO-S]  47.75,8.64 0 bottom
LOGO6  SFE_LOGO_NAME_FLAME.1_INCH  [SFE_LOGO_NAME_FLAME_.1]  62.99,7.11 0 bottom
LOGO7  OSHW-LOGOS  [OSHW-LOGO-S]  47.75,8.64 0 top
LOGO8  SFE_LOGO_NAME_FLAME.1_INCH  [SFE_LOGO_NAME_FLAME_.1]  51.21,7.11 0 top
LOGO9  OSHW-LOGOS  [OSHW-LOGO-S]  80.77,8.64 0 bottom
LOGO10  SFE_LOGO_NAME_FLAME.1_INCH  [SFE_LOGO_NAME_FLAME_.1]  96.01,7.11 0 bottom
LOGO11  OSHW-LOGOS  [OSHW-LOGO-S]  80.77,8.64 0 top
LOGO12  SFE_LOGO_NAME_FLAME.1_INCH  [SFE_LOGO_NAME_FLAME_.1]  84.23,7.11 0 top
LOGO13  OSHW-LOGOS  [OSHW-LOGO-S]  113.79,8.64 0 bottom
LOGO14  SFE_LOGO_NAME_FLAME.1_INCH  [SFE_LOGO_NAME_FLAME_.1]  129.03,7.11 0 bottom
LOGO15  OSHW-LOGOS  [OSHW-LOGO-S]  113.79,8.64 0 top
LOGO16  SFE_LOGO_NAME_FLAME.1_INCH  [SFE_LOGO_NAME_FLAME_.1]  117.25,7.11 0 top
LOGO17  OSHW-LOGOS  [OSHW-LOGO-S]  14.73,56.9 0 bottom
LOGO18  SFE_LOGO_NAME_FLAME.1_INCH  [SFE_LOGO_NAME_FLAME_.1]  29.97,55.37 0 bottom
LOGO19  OSHW-LOGOS  [OSHW-LOGO-S]  14.73,56.9 0 top
LOGO20  SFE_LOGO_NAME_FLAME.1_INCH  [SFE_LOGO_NAME_FLAME_.1]  18.19,55.37 0 top
LOGO21  OSHW-LOGOS  [OSHW-LOGO-S]  47.75,56.9 0 bottom
LOGO22  SFE_LOGO_NAME_FLAME.1_INCH  [SFE_LOGO_NAME_FLAME_.1]  62.99,55.37 0 bottom
LOGO23  OSHW-LOGOS  [OSHW-LOGO-S]  47.75,56.9 0 top
LOGO24  SFE_LOGO_NAME_FLAME.1_INCH  [SFE_LOGO_NAME_FLAME_.1]  51.21,55.37 0 top
LOGO25  OSHW-LOGOS  [OSHW-LOGO-S]  80.77,56.9 0 bottom
LOGO26  SFE_LOGO_NAME_FLAME.1_INCH  [SFE_LOGO_NAME_FLAME_.1]  96.01,55.37 0 bottom
LOGO27  OSHW-LOGOS  [OSHW-LOGO-S]  80.77,56.9 0 top
LOGO28  SFE_LOGO_NAME_FLAME.1_INCH  [SFE_LOGO_NAME_FLAME_.1]  84.23,55.37 0 top
LOGO29  OSHW-LOGOS  [OSHW-LOGO-S]  113.79,56.9 0 bottom
LOGO30  SFE_LOGO_NAME_FLAME.1_INCH  [SFE_LOGO_NAME_FLAME_.1]  129.03,55.37 0 bottom
LOGO31  OSHW-LOGOS  [OSHW-LOGO-S]  113.79,56.9 0 top
LOGO32  SFE_LOGO_NAME_FLAME.1_INCH  [SFE_LOGO_NAME_FLAME_.1]  117.25,55.37 0 top
LOGO33  OSHW-LOGOS  [OSHW-LOGO-S]  160.53,8.64 0 bottom
LOGO34  SFE_LOGO_NAME_FLAME.1_INCH  [SFE_LOGO_NAME_FLAME_.1]  175.77,7.11 0 bottom
LOGO35  OSHW-LOGOS  [OSHW-LOGO-S]  160.53,8.64 0 top
LOGO36  SFE_LOGO_NAME_FLAME.1_INCH  [SFE_LOGO_NAME_FLAME_.1]  163.98,7.11 0 top
LOGO37  OSHW-LOGOS  [OSHW-LOGO-S]  193.55,8.64 0 bottom
LOGO38  SFE_LOGO_NAME_FLAME.1_INCH  [SFE_LOGO_NAME_FLAME_.1]  208.79,7.11 0 bottom
LOGO39  OSHW-LOGOS  [OSHW-LOGO-S]  193.55,8.64 0 top
LOGO40  SFE_LOGO_NAME_FLAME.1_INCH  [SFE_LOGO_NAME_FLAME_.1]  197,7.11 0 top
LOGO41  OSHW-LOGOS  [OSHW-LOGO-S]  226.57,8.64 0 bottom
LOGO42  SFE_LOGO_NAME_FLAME.1_INCH  [SFE_LOGO_NAME_FLAME_.1]  241.81,7.11 0 bottom
LOGO43  OSHW-LOGOS  [OSHW-LOGO-S]  226.57,8.64 0 top
LOGO44  SFE_LOGO_NAME_FLAME.1_INCH  [SFE_LOGO_NAME_FLAME_.1]  230.02,7.11 0 top
LOGO45  OSHW-LOGOS  [OSHW-LOGO-S]  259.59,8.64 0 bottom
LOGO46  SFE_LOGO_NAME_FLAME.1_INCH  [SFE_LOGO_NAME_FLAME_.1]  274.83,7.11 0 bottom
LOGO47  OSHW-LOGOS  [OSHW-LOGO-S]  259.59,8.64 0 top
LOGO48  SFE_LOGO_NAME_FLAME.1_INCH  [SFE_LOGO_NAME_FLAME_.1]  263.04,7.11 0 top
LOGO49  OSHW-LOGOS  [OSHW-LOGO-S]  160.53,56.9 0 bottom
LOGO50  SFE_LOGO_NAME_FLAME.1_INCH  [SFE_LOGO_NAME_FLAME_.1]  175.77,55.37 0 bottom
LOGO51  OSHW-LOGOS  [OSHW-LOGO-S]  160.53,56.9 0 top
LOGO52  SFE_LOGO_NAME_FLAME.1_INCH  [SFE_LOGO_NAME_FLAME_.1]  163.98,55.37 0 top
LOGO53  OSHW-LOGOS  [OSHW-LOGO-S]  193.55,56.9 0 bottom
LOGO54  SFE_LOGO_NAME_FLAME.1_INCH  [SFE_LOGO_NAME_FLAME_.1]  208.79,55.37 0 bottom
LOGO55  OSHW-LOGOS  [OSHW-LOGO-S]  193.55,56.9 0 top
LOGO56  SFE_LOGO_NAME_FLAME.1_INCH  [SFE_LOGO_NAME_FLAME_.1]  197,55.37 0 top
LOGO57  OSHW-LOGOS  [OSHW-LOGO-S]  226.57,56.9 0 bottom
LOGO58  SFE_LOGO_NAME_FLAME.1_INCH  [SFE_LOGO_NAME_FLAME_.1]  241.81,55.37 0 bottom
LOGO59  OSHW-LOGOS  [OSHW-LOGO-S]  226.57,56.9 0 top
LOGO60  SFE_LOGO_NAME_FLAME.1_INCH  [SFE_LOGO_NAME_FLAME_.1]  230.02,55.37 0 top
LOGO61  OSHW-LOGOS  [OSHW-LOGO-S]  259.59,56.9 0 bottom
LOGO62  SFE_LOGO_NAME_FLAME.1_INCH  [SFE_LOGO_NAME_FLAME_.1]  274.83,55.37 0 bottom
LOGO63  OSHW-LOGOS  [OSHW-LOGO-S]  259.59,56.9 0 top
LOGO64  SFE_LOGO_NAME_FLAME.1_INCH  [SFE_LOGO_NAME_FLAME_.1]  263.04,55.37 0 top
LOGO65  OSHW-LOGOS  [OSHW-LOGO-S]  14.73,118.87 0 bottom
LOGO66  SFE_LOGO_NAME_FLAME.1_INCH  [SFE_LOGO_NAME_FLAME_.1]  29.97,117.35 0 bottom
LOGO67  OSHW-LOGOS  [OSHW-LOGO-S]  14.73,118.87 0 top
LOGO68  SFE_LOGO_NAME_FLAME.1_INCH  [SFE_LOGO_NAME_FLAME_.1]  18.19,117.35 0 top
LOGO69  OSHW-LOGOS  [OSHW-LOGO-S]  47.75,118.87 0 bottom
LOGO70  SFE_LOGO_NAME_FLAME.1_INCH  [SFE_LOGO_NAME_FLAME_.1]  62.99,117.35 0 bottom
LOGO71  OSHW-LOGOS  [OSHW-LOGO-S]  47.75,118.87 0 top
LOGO72  SFE_LOGO_NAME_FLAME.1_INCH  [SFE_LOGO_NAME_FLAME_.1]  51.21,117.35 0 top
LOGO73  OSHW-LOGOS  [OSHW-LOGO-S]  80.77,118.87 0 bottom
LOGO74  SFE_LOGO_NAME_FLAME.1_INCH  [SFE_LOGO_NAME_FLAME_.1]  96.01,117.35 0 bottom
LOGO75  OSHW-LOGOS  [OSHW-LOGO-S]  80.77,118.87 0 top
LOGO76  SFE_LOGO_NAME_FLAME.1_INCH  [SFE_LOGO_NAME_FLAME_.1]  84.23,117.35 0 top
LOGO77  OSHW-LOGOS  [OSHW-LOGO-S]  113.79,118.87 0 bottom
LOGO78  SFE_LOGO_NAME_FLAME.1_INCH  [SFE_LOGO_NAME_FLAME_.1]  129.03,117.35 0 bottom
LOGO79  OSHW-LOGOS  [OSHW-LOGO-S]  113.79,118.87 0 top
LOGO80  SFE_LOGO_NAME_FLAME.1_INCH  [SFE_LOGO_NAME_FLAME_.1]  117.25,117.35 0 top
LOGO81  OSHW-LOGOS  [OSHW-LOGO-S]  14.73,167.13 0 bottom
LOGO82  SFE_LOGO_NAME_FLAME.1_INCH  [SFE_LOGO_NAME_FLAME_.1]  29.97,165.61 0 bottom
LOGO83  OSHW-LOGOS  [OSHW-LOGO-S]  14.73,167.13 0 top
LOGO84  SFE_LOGO_NAME_FLAME.1_INCH  [SFE_LOGO_NAME_FLAME_.1]  18.19,165.61 0 top
LOGO85  OSHW-LOGOS  [OSHW-LOGO-S]  47.75,167.13 0 bottom
LOGO86  SFE_LOGO_NAME_FLAME.1_INCH  [SFE_LOGO_NAME_FLAME_.1]  62.99,165.61 0 bottom
LOGO87  OSHW-LOGOS  [OSHW-LOGO-S]  47.75,167.13 0 top
LOGO88  SFE_LOGO_NAME_FLAME.1_INCH  [SFE_LOGO_NAME_FLAME_.1]  51.21,165.61 0 top
LOGO89  OSHW-LOGOS  [OSHW-LOGO-S]  80.77,167.13 0 bottom
LOGO90  SFE_LOGO_NAME_FLAME.1_INCH  [SFE_LOGO_NAME_FLAME_.1]  96.01,165.61 0 bottom
LOGO91  OSHW-LOGOS  [OSHW-LOGO-S]  80.77,167.13 0 top
LOGO92  SFE_LOGO_NAME_FLAME.1_INCH  [SFE_LOGO_NAME_FLAME_.1]  84.23,165.61 0 top
LOGO93  OSHW-LOGOS  [OSHW-LOGO-S]  113.79,167.13 0 bottom
LOGO94  SFE_LOGO_NAME_FLAME.1_INCH  [SFE_LOGO_NAME_FLAME_.1]  129.03,165.61 0 bottom
LOGO95  OSHW-LOGOS  [OSHW-LOGO-S]  113.79,167.13 0 top
LOGO96  SFE_LOGO_NAME_FLAME.1_INCH  [SFE_LOGO_NAME_FLAME_.1]  117.25,165.61 0 top
LOGO97  OSHW-LOGOS  [OSHW-LOGO-S]  160.53,118.87 0 bottom
LOGO98  SFE_LOGO_NAME_FLAME.1_INCH  [SFE_LOGO_NAME_FLAME_.1]  175.77,117.35 0 bottom
LOGO99  OSHW-LOGOS  [OSHW-LOGO-S]  160.53,118.87 0 top
LOGO100  SFE_LOGO_NAME_FLAME.1_INCH  [SFE_LOGO_NAME_FLAME_.1]  163.98,117.35 0 top
LOGO101  OSHW-LOGOS  [OSHW-LOGO-S]  193.55,118.87 0 bottom
LOGO102  SFE_LOGO_NAME_FLAME.1_INCH  [SFE_LOGO_NAME_FLAME_.1]  208.79,117.35 0 bottom
LOGO103  OSHW-LOGOS  [OSHW-LOGO-S]  193.55,118.87 0 top
LOGO104  SFE_LOGO_NAME_FLAME.1_INCH  [SFE_LOGO_NAME_FLAME_.1]  197,117.35 0 top
LOGO105  OSHW-LOGOS  [OSHW-LOGO-S]  226.57,118.87 0 bottom
LOGO106  SFE_LOGO_NAME_FLAME.1_INCH  [SFE_LOGO_NAME_FLAME_.1]  241.81,117.35 0 bottom
LOGO107  OSHW-LOGOS  [OSHW-LOGO-S]  226.57,118.87 0 top
LOGO108  SFE_LOGO_NAME_FLAME.1_INCH  [SFE_LOGO_NAME_FLAME_.1]  230.02,117.35 0 top
LOGO109  OSHW-LOGOS  [OSHW-LOGO-S]  259.59,118.87 0 bottom
LOGO110  SFE_LOGO_NAME_FLAME.1_INCH  [SFE_LOGO_NAME_FLAME_.1]  274.83,117.35 0 bottom
LOGO111  OSHW-LOGOS  [OSHW-LOGO-S]  259.59,118.87 0 top
LOGO112  SFE_LOGO_NAME_FLAME.1_INCH  [SFE_LOGO_NAME_FLAME_.1]  263.04,117.35 0 top
LOGO113  OSHW-LOGOS  [OSHW-LOGO-S]  160.53,167.13 0 bottom
LOGO114  SFE_LOGO_NAME_FLAME.1_INCH  [SFE_LOGO_NAME_FLAME_.1]  175.77,165.61 0 bottom
LOGO115  OSHW-LOGOS  [OSHW-LOGO-S]  160.53,167.13 0 top
LOGO116  SFE_LOGO_NAME_FLAME.1_INCH  [SFE_LOGO_NAME_FLAME_.1]  163.98,165.61 0 top
LOGO117  OSHW-LOGOS  [OSHW-LOGO-S]  193.55,167.13 0 bottom
LOGO118  SFE_LOGO_NAME_FLAME.1_INCH  [SFE_LOGO_NAME_FLAME_.1]  208.79,165.61 0 bottom
LOGO119  OSHW-LOGOS  [OSHW-LOGO-S]  193.55,167.13 0 top
LOGO120  SFE_LOGO_NAME_FLAME.1_INCH  [SFE_LOGO_NAME_FLAME_.1]  197,165.61 0 top
LOGO121  OSHW-LOGOS  [OSHW-LOGO-S]  226.57,167.13 0 bottom
LOGO122  SFE_LOGO_NAME_FLAME.1_INCH  [SFE_LOGO_NAME_FLAME_.1]  241.81,165.61 0 bottom
LOGO123  OSHW-LOGOS  [OSHW-LOGO-S]  226.57,167.13 0 top
LOGO124  SFE_LOGO_NAME_FLAME.1_INCH  [SFE_LOGO_NAME_FLAME_.1]  230.02,165.61 0 top
LOGO125  OSHW-LOGOS  [OSHW-LOGO-S]  259.59,167.13 0 bottom
LOGO126  SFE_LOGO_NAME_FLAME.1_INCH  [SFE_LOGO_NAME_FLAME_.1]  274.83,165.61 0 bottom
LOGO127  OSHW-LOGOS  [OSHW-LOGO-S]  259.59,167.13 0 top
LOGO128  SFE_LOGO_NAME_FLAME.1_INCH  [SFE_LOGO_NAME_FLAME_.1]  263.04,165.61 0 top
R1  2.0k  [0603-RES]  18.8,45.72 270 top
R2  330  [0603-RES]  9.91,45.97 90 top
R3  1k  [0603-RES]  9.91,11.94 270 top
R4  2.0k  [0603-RES]  51.82,45.72 270 top
R5  330  [0603-RES]  42.93,45.97 90 top
R6  1k  [0603-RES]  42.93,11.94 270 top
R7  2.0k  [0603-RES]  84.84,45.72 270 top
R8  330  [0603-RES]  75.95,45.97 90 top
R9  1k  [0603-RES]  75.95,11.94 270 top
R10  2.0k  [0603-RES]  117.86,45.72 270 top
R11  330  [0603-RES]  108.97,45.97 90 top
R12  1k  [0603-RES]  108.97,11.94 270 top
R13  2.0k  [0603-RES]  18.8,93.98 270 top
R14  330  [0603-RES]  9.91,94.23 90 top
R15  1k  [0603-RES]  9.91,60.2 270 top
R16  2.0k  [0603-RES]  51.82,93.98 270 top
R17  330  [0603-RES]  42.93,94.23 90 top
R18  1k  [0603-RES]  42.93,60.2 270 top
R19  2.0k  [0603-RES]  84.84,93.98 270 top
R20  330  [0603-RES]  75.95,94.23 90 top
R21  1k  [0603-RES]  75.95,60.2 270 top
R22  2.0k  [0603-RES]  117.86,93.98 270 top
R23  330  [0603-RES]  108.97,94.23 90 top
R24  1k  [0603-RES]  108.97,60.2 270 top
R25  2.0k  [0603-RES]  164.59,45.72 270 top
R26  330  [0603-RES]  155.7,45.97 90 top
R27  1k  [0603-RES]  155.7,11.94 270 top
R28  2.0k  [0603-RES]  197.61,45.72 270 top
R29  330  [0603-RES]  188.72,45.97 90 top
R30  1k  [0603-RES]  188.72,11.94 270 top
R31  2.0k  [0603-RES]  230.63,45.72 270 top
R32  330  [0603-RES]  221.74,45.97 90 top
R33  1k  [0603-RES]  221.74,11.94 270 top
R34  2.0k  [0603-RES]  263.65,45.72 270 top
R35  330  [0603-RES]  254.76,45.97 90 top
R36  1k  [0603-RES]  254.76,11.94 270 top
R37  2.0k  [0603-RES]  164.59,93.98 270 top
R38  330  [0603-RES]  155.7,94.23 90 top
R39  1k  [0603-RES]  155.7,60.2 270 top
R40  2.0k  [0603-RES]  197.61,93.98 270 top
R41  330  [0603-RES]  188.72,94.23 90 top
R42  1k  [0603-RES]  188.72,60.2 270 top
R43  2.0k  [0603-RES]  230.63,93.98 270 top
R44  330  [0603-RES]  221.74,94.23 90 top
R45  1k  [0603-RES]  221.74,60.2 270 top
R46  2.0k  [0603-RES]  263.65,93.98 270 top
R47  330  [0603-RES]  254.76,94.23 90 top
R48  1k  [0603-RES]  254.76,60.2 270 top
R49  2.0k  [0603-RES]  18.8,155.96 270 top
R50  330  [0603-RES]  9.91,156.21 90 top
R51  1k  [0603-RES]  9.91,122.17 270 top
R52  2.0k  [0603-RES]  51.82,155.96 270 top
R53  330  [0603-RES]  42.93,156.21 90 top
R54  1k  [0603-RES]  42.93,122.17 270 top
R55  2.0k  [0603-RES]  84.84,155.96 270 top
R56  330  [0603-RES]  75.95,156.21 90 top
R57  1k  [0603-RES]  75.95,122.17 270 top
R58  2.0k  [0603-RES]  117.86,155.96 270 top
R59  330  [0603-RES]  108.97,156.21 90 top
R60  1k  [0603-RES]  108.97,122.17 270 top
R61  2.0k  [0603-RES]  18.8,204.22 270 top
R62  330  [0603-RES]  9.91,204.47 90 top
R63  1k  [0603-RES]  9.91,170.43 270 top
R64  2.0k  [0603-RES]  51.82,204.22 270 top
R65  330  [0603-RES]  42.93,204.47 90 top
R66  1k  [0603-RES]  42.93,170.43 270 top
R67  2.0k  [0603-RES]  84.84,204.22 270 top
R68  330  [0603-RES]  75.95,204.47 90 top
R69  1k  [0603-RES]  75.95,170.43 270 top
R70  2.0k  [0603-RES]  117.86,204.22 270 top
R71  330  [0603-RES]  108.97,204.47 90 top
R72  1k  [0603-RES]  108.97,170.43 270 top
R73  2.0k  [0603-RES]  164.59,155.96 270 top
R74  330  [0603-RES]  155.7,156.21 90 top
R75  1k  [0603-RES]  155.7,122.17 270 top
R76  2.0k  [0603-RES]  197.61,155.96 270 top
R77  330  [0603-RES]  188.72,156.21 90 top
R78  1k  [0603-RES]  188.72,122.17 270 top
R79  2.0k  [0603-RES]  230.63,155.96 270 top
R80  330  [0603-RES]  221.74,156.21 90 top
R81  1k  [0603-RES]  221.74,122.17 270 top
R82  2.0k  [0603-RES]  263.65,155.96 270 top
R83  330  [0603-RES]  254.76,156.21 90 top
R84  1k  [0603-RES]  254.76,122.17 270 top
R85  2.0k  [0603-RES]  164.59,204.22 270 top
R86  330  [0603-RES]  155.7,204.47 90 top
R87  1k  [0603-RES]  155.7,170.43 270 top
R88  2.0k  [0603-RES]  197.61,204.22 270 top
R89  330  [0603-RES]  188.72,204.47 90 top
R90  1k  [0603-RES]  188.72,170.43 270 top
R91  2.0k  [0603-RES]  230.63,204.22 270 top
R92  330  [0603-RES]  221.74,204.47 90 top
R93  1k  [0603-RES]  221.74,170.43 270 top
R94  2.0k  [0603-RES]  263.65,204.22 270 top
R95  330  [0603-RES]  254.76,204.47 90 top
R96  1k  [0603-RES]  254.76,170.43 270 top
SJ1  LED DISABLE  [PAD-JUMPER-2-NC_BY_TRACE_YES_SILK]  13.84,22.73 90 top
SJ2  LED DISABLE  [PAD-JUMPER-2-NC_BY_TRACE_YES_SILK]  46.86,22.73 90 top
SJ3  LED DISABLE  [PAD-JUMPER-2-NC_BY_TRACE_YES_SILK]  79.88,22.73 90 top
SJ4  LED DISABLE  [PAD-JUMPER-2-NC_BY_TRACE_YES_SILK]  112.9,22.73 90 top
SJ5  LED DISABLE  [PAD-JUMPER-2-NC_BY_TRACE_YES_SILK]  13.84,70.99 90 top
SJ6  LED DISABLE  [PAD-JUMPER-2-NC_BY_TRACE_YES_SILK]  46.86,70.99 90 top
SJ7  LED DISABLE  [PAD-JUMPER-2-NC_BY_TRACE_YES_SILK]  79.88,70.99 90 top
SJ8  LED DISABLE  [PAD-JUMPER-2-NC_BY_TRACE_YES_SILK]  112.9,70.99 90 top
SJ9  LED DISABLE  [PAD-JUMPER-2-NC_BY_TRACE_YES_SILK]  159.64,22.73 90 top
SJ10  LED DISABLE  [PAD-JUMPER-2-NC_BY_TRACE_YES_SILK]  192.66,22.73 90 top
SJ11  LED DISABLE  [PAD-JUMPER-2-NC_BY_TRACE_YES_SILK]  225.68,22.73 90 top
SJ12  LED DISABLE  [PAD-JUMPER-2-NC_BY_TRACE_YES_SILK]  258.7,22.73 90 top
SJ13  LED DISABLE  [PAD-JUMPER-2-NC_BY_TRACE_YES_SILK]  159.64,70.99 90 top
SJ14  LED DISABLE  [PAD-JUMPER-2-NC_BY_TRACE_YES_SILK]  192.66,70.99 90 top
SJ15  LED DISABLE  [PAD-JUMPER-2-NC_BY_TRACE_YES_SILK]  225.68,70.99 90 top
SJ16  LED DISABLE  [PAD-JUMPER-2-NC_BY_TRACE_YES_SILK]  258.7,70.99 90 top
SJ17  LED DISABLE  [PAD-JUMPER-2-NC_BY_TRACE_YES_SILK]  13.84,132.97 90 top
SJ18  LED DISABLE  [PAD-JUMPER-2-NC_BY_TRACE_YES_SILK]  46.86,132.97 90 top
SJ19  LED DISABLE  [PAD-JUMPER-2-NC_BY_TRACE_YES_SILK]  79.88,132.97 90 top
SJ20  LED DISABLE  [PAD-JUMPER-2-NC_BY_TRACE_YES_SILK]  112.9,132.97 90 top
SJ21  LED DISABLE  [PAD-JUMPER-2-NC_BY_TRACE_YES_SILK]  13.84,181.23 90 top
SJ22  LED DISABLE  [PAD-JUMPER-2-NC_BY_TRACE_YES_SILK]  46.86,181.23 90 top
SJ23  LED DISABLE  [PAD-JUMPER-2-NC_BY_TRACE_YES_SILK]  79.88,181.23 90 top
SJ24  LED DISABLE  [PAD-JUMPER-2-NC_BY_TRACE_YES_SILK]  112.9,181.23 90 top
SJ25  LED DISABLE  [PAD-JUMPER-2-NC_BY_TRACE_YES_SILK]  159.64,132.97 90 top
SJ26  LED DISABLE  [PAD-JUMPER-2-NC_BY_TRACE_YES_SILK]  192.66,132.97 90 top
SJ27  LED DISABLE  [PAD-JUMPER-2-NC_BY_TRACE_YES_SILK]  225.68,132.97 90 top
SJ28  LED DISABLE  [PAD-JUMPER-2-NC_BY_TRACE_YES_SILK]  258.7,132.97 90 top
SJ29  LED DISABLE  [PAD-JUMPER-2-NC_BY_TRACE_YES_SILK]  159.64,181.23 90 top
SJ30  LED DISABLE  [PAD-JUMPER-2-NC_BY_TRACE_YES_SILK]  192.66,181.23 90 top
SJ31  LED DISABLE  [PAD-JUMPER-2-NC_BY_TRACE_YES_SILK]  225.68,181.23 90 top
SJ32  LED DISABLE  [PAD-JUMPER-2-NC_BY_TRACE_YES_SILK]  258.7,181.23 90 top
SW1  SWITCH_SPDT  [KPS-1290]  10.79,28.7 270 top
SW2  SWITCH_SPDT  [KPS-1290]  43.81,28.7 270 top
SW3  SWITCH_SPDT  [KPS-1290]  76.83,28.7 270 top
SW4  SWITCH_SPDT  [KPS-1290]  109.86,28.7 270 top
SW5  SWITCH_SPDT  [KPS-1290]  10.79,76.96 270 top
SW6  SWITCH_SPDT  [KPS-1290]  43.81,76.96 270 top
SW7  SWITCH_SPDT  [KPS-1290]  76.83,76.96 270 top
SW8  SWITCH_SPDT  [KPS-1290]  109.86,76.96 270 top
SW9  SWITCH_SPDT  [KPS-1290]  156.59,28.7 270 top
SW10  SWITCH_SPDT  [KPS-1290]  189.61,28.7 270 top
SW11  SWITCH_SPDT  [KPS-1290]  222.63,28.7 270 top
SW12  SWITCH_SPDT  [KPS-1290]  255.65,28.7 270 top
SW13  SWITCH_SPDT  [KPS-1290]  156.59,76.96 270 top
SW14  SWITCH_SPDT  [KPS-1290]  189.61,76.96 270 top
SW15  SWITCH_SPDT  [KPS-1290]  222.63,76.96 270 top
SW16  SWITCH_SPDT  [KPS-1290]  255.65,76.96 270 top
SW17  SWITCH_SPDT  [KPS-1290]  10.79,138.94 270 top
SW18  SWITCH_SPDT  [KPS-1290]  43.81,138.94 270 top
SW19  SWITCH_SPDT  [KPS-1290]  76.83,138.94 270 top
SW20  SWITCH_SPDT  [KPS-1290]  109.86,138.94 270 top
SW21  SWITCH_SPDT  [KPS-1290]  10.79,187.2 270 top
SW22  SWITCH_SPDT  [KPS-1290]  43.81,187.2 270 top
SW23  SWITCH_SPDT  [KPS-1290]  76.83,187.2 270 top
SW24  SWITCH_SPDT  [KPS-1290]  109.86,187.2 270 top
SW25  SWITCH_SPDT  [KPS-1290]  156.59,138.94 270 top
SW26  SWITCH_SPDT  [KPS-1290]  189.61,138.94 270 top
SW27  SWITCH_SPDT  [KPS-1290]  222.63,138.94 270 top
SW28  SWITCH_SPDT  [KPS-1290]  255.65,138.94 270 top
SW29  SWITCH_SPDT  [KPS-1290]  156.59,187.2 270 top
SW30  SWITCH_SPDT  [KPS-1290]  189.61,187.2 270 top
SW31  SWITCH_SPDT  [KPS-1290]  222.63,187.2 270 top
SW32  SWITCH_SPDT  [KPS-1290]  255.65,187.2 270 top
U1  MCP73831  [SOT23-5]  16.51,46.23 180 top
U2  EDISON_CONNECTOR_FULLMOUNTING_HOLES  [EDISON_DAUGHTER]  36.83,10.67 0 bottom
U3  EDISON_CONNECTOR_FULLHEADER  [DF40C-70DP-0.4(51)]  33.53,23.04 90 bottom
U4  EDISON_CONNECTOR_FULLMOUNTING_HOLES  [EDISON_DAUGHTER]  69.85,10.67 0 bottom
U5  EDISON_CONNECTOR_FULLHEADER  [DF40C-70DP-0.4(51)]  66.55,23.04 90 bottom
U6  MCP73831  [SOT23-5]  49.53,46.23 180 top
U7  EDISON_CONNECTOR_FULLMOUNTING_HOLES  [EDISON_DAUGHTER]  102.87,10.67 0 bottom
U8  EDISON_CONNECTOR_FULLHEADER  [DF40C-70DP-0.4(51)]  99.57,23.04 90 bottom
U9  MCP73831  [SOT23-5]  82.55,46.23 180 top
U10  EDISON_CONNECTOR_FULLMOUNTING_HOLES  [EDISON_DAUGHTER]  135.89,10.67 0 bottom
U11  EDISON_CONNECTOR_FULLHEADER  [DF40C-70DP-0.4(51)]  132.59,23.04 90 bottom
U12  MCP73831  [SOT23-5]  115.57,46.23 180 top
U13  EDISON_CONNECTOR_FULLMOUNTING_HOLES  [EDISON_DAUGHTER]  36.83,58.93 0 bottom
U14  EDISON_CONNECTOR_FULLHEADER  [DF40C-70DP-0.4(51)]  33.53,71.3 90 bottom
U15  MCP73831  [SOT23-5]  16.51,94.49 180 top
U16  EDISON_CONNECTOR_FULLMOUNTING_HOLES  [EDISON_DAUGHTER]  69.85,58.93 0 bottom
U17  EDISON_CONNECTOR_FULLHEADER  [DF40C-70DP-0.4(51)]  66.55,71.3 90 bottom
U18  MCP73831  [SOT23-5]  49.53,94.49 180 top
U19  EDISON_CONNECTOR_FULLMOUNTING_HOLES  [EDISON_DAUGHTER]  102.87,58.93 0 bottom
U20  EDISON_CONNECTOR_FULLHEADER  [DF40C-70DP-0.4(51)]  99.57,71.3 90 bottom
U21  MCP73831  [SOT23-5]  82.55,94.49 180 top
U22  EDISON_CONNECTOR_FULLMOUNTING_HOLES  [EDISON_DAUGHTER]  135.89,58.93 0 bottom
U23  EDISON_CONNECTOR_FULLHEADER  [DF40C-70DP-0.4(51)]  132.59,71.3 90 bottom
U24  MCP73831  [SOT23-5]  115.57,94.49 180 top
U25  EDISON_CONNECTOR_FULLMOUNTING_HOLES  [EDISON_DAUGHTER]  182.63,10.67 0 bottom
U26  EDISON_CONNECTOR_FULLHEADER  [DF40C-70DP-0.4(51)]  179.33,23.04 90 bottom
U27  MCP73831  [SOT23-5]  162.31,46.23 180 top
U28  EDISON_CONNECTOR_FULLMOUNTING_HOLES  [EDISON_DAUGHTER]  215.65,10.67 0 bottom
U29  EDISON_CONNECTOR_FULLHEADER  [DF40C-70DP-0.4(51)]  212.35,23.04 90 bottom
U30  MCP73831  [SOT23-5]  195.33,46.23 180 top
U31  EDISON_CONNECTOR_FULLMOUNTING_HOLES  [EDISON_DAUGHTER]  248.67,10.67 0 bottom
U32  EDISON_CONNECTOR_FULLHEADER  [DF40C-70DP-0.4(51)]  245.37,23.04 90 bottom
U33  MCP73831  [SOT23-5]  228.35,46.23 180 top
U34  EDISON_CONNECTOR_FULLMOUNTING_HOLES  [EDISON_DAUGHTER]  281.69,10.67 0 bottom
U35  EDISON_CONNECTOR_FULLHEADER  [DF40C-70DP-0.4(51)]  278.39,23.04 90 bottom
U36  MCP73831  [SOT23-5]  261.37,46.23 180 top
U37  EDISON_CONNECTOR_FULLMOUNTING_HOLES  [EDISON_DAUGHTER]  182.63,58.93 0 bottom
U38  EDISON_CONNECTOR_FULLHEADER  [DF40C-70DP-0.4(51)]  179.33,71.3 90 bottom
U39  MCP73831  [SOT23-5]  162.31,94.49 180 top
U40  EDISON_CONNECTOR_FULLMOUNTING_HOLES  [EDISON_DAUGHTER]  215.65,58.93 0 bottom
U41  EDISON_CONNECTOR_FULLHEADER  [DF40C-70DP-0.4(51)]  212.35,71.3 90 bottom
U42  MCP73831  [SOT23-5]  195.33,94.49 180 top
U43  EDISON_CONNECTOR_FULLMOUNTING_HOLES  [EDISON_DAUGHTER]  248.67,58.93 0 bottom
U44  EDISON_CONNECTOR_FULLHEADER  [DF40C-70DP-0.4(51)]  245.37,71.3 90 bottom
U45  MCP73831  [SOT23-5]  228.35,94.49 180 top
U46  EDISON_CONNECTOR_FULLMOUNTING_HOLES  [EDISON_DAUGHTER]  281.69,58.93 0 bottom
U47  EDISON_CONNECTOR_FULLHEADER  [DF40C-70DP-0.4(51)]  278.39,71.3 90 bottom
U48  MCP73831  [SOT23-5]  261.37,94.49 180 top
U49  EDISON_CONNECTOR_FULLMOUNTING_HOLES  [EDISON_DAUGHTER]  36.83,120.9 0 bottom
U50  EDISON_CONNECTOR_FULLHEADER  [DF40C-70DP-0.4(51)]  33.53,133.27 90 bottom
U51  MCP73831  [SOT23-5]  16.51,156.46 180 top
U52  EDISON_CONNECTOR_FULLMOUNTING_HOLES  [EDISON_DAUGHTER]  69.85,120.9 0 bottom
U53  EDISON_CONNECTOR_FULLHEADER  [DF40C-70DP-0.4(51)]  66.55,133.27 90 bottom
U54  MCP73831  [SOT23-5]  49.53,156.46 180 top
U55  EDISON_CONNECTOR_FULLMOUNTING_HOLES  [EDISON_DAUGHTER]  102.87,120.9 0 bottom
U56  EDISON_CONNECTOR_FULLHEADER  [DF40C-70DP-0.4(51)]  99.57,133.27 90 bottom
U57  MCP73831  [SOT23-5]  82.55,156.46 180 top
U58  EDISON_CONNECTOR_FULLMOUNTING_HOLES  [EDISON_DAUGHTER]  135.89,120.9 0 bottom
U59  EDISON_CONNECTOR_FULLHEADER  [DF40C-70DP-0.4(51)]  132.59,133.27 90 bottom
U60  MCP73831  [SOT23-5]  115.57,156.46 180 top
U61  EDISON_CONNECTOR_FULLMOUNTING_HOLES  [EDISON_DAUGHTER]  36.83,169.16 0 bottom
U62  EDISON_CONNECTOR_FULLHEADER  [DF40C-70DP-0.4(51)]  33.53,181.53 90 bottom
U63  MCP73831  [SOT23-5]  16.51,204.72 180 top
U64  EDISON_CONNECTOR_FULLMOUNTING_HOLES  [EDISON_DAUGHTER]  69.85,169.16 0 bottom
U65  EDISON_CONNECTOR_FULLHEADER  [DF40C-70DP-0.4(51)]  66.55,181.53 90 bottom
U66  MCP73831  [SOT23-5]  49.53,204.72 180 top
U67  EDISON_CONNECTOR_FULLMOUNTING_HOLES  [EDISON_DAUGHTER]  102.87,169.16 0 bottom
U68  EDISON_CONNECTOR_FULLHEADER  [DF40C-70DP-0.4(51)]  99.57,181.53 90 bottom
U69  MCP73831  [SOT23-5]  82.55,204.72 180 top
U70  EDISON_CONNECTOR_FULLMOUNTING_HOLES  [EDISON_DAUGHTER]  135.89,169.16 0 bottom
U71  EDISON_CONNECTOR_FULLHEADER  [DF40C-70DP-0.4(51)]  132.59,181.53 90 bottom
U72  MCP73831  [SOT23-5]  115.57,204.72 180 top
U73  EDISON_CONNECTOR_FULLMOUNTING_HOLES  [EDISON_DAUGHTER]  182.63,120.9 0 bottom
U74  EDISON_CONNECTOR_FULLHEADER  [DF40C-70DP-0.4(51)]  179.33,133.27 90 bottom
U75  MCP73831  [SOT23-5]  162.31,156.46 180 top
U76  EDISON_CONNECTOR_FULLMOUNTING_HOLES  [EDISON_DAUGHTER]  215.65,120.9 0 bottom
U77  EDISON_CONNECTOR_FULLHEADER  [DF40C-70DP-0.4(51)]  212.35,133.27 90 bottom
U78  MCP73831  [SOT23-5]  195.33,156.46 180 top
U79  EDISON_CONNECTOR_FULLMOUNTING_HOLES  [EDISON_DAUGHTER]  248.67,120.9 0 bottom
U80  EDISON_CONNECTOR_FULLHEADER  [DF40C-70DP-0.4(51)]  245.37,133.27 90 bottom
U81  MCP73831  [SOT23-5]  228.35,156.46 180 top
U82  EDISON_CONNECTOR_FULLMOUNTING_HOLES  [EDISON_DAUGHTER]  281.69,120.9 0 bottom
U83  EDISON_CONNECTOR_FULLHEADER  [DF40C-70DP-0.4(51)]  278.39,133.27 90 bottom
U84  MCP73831  [SOT23-5]  261.37,156.46 180 top
U85  EDISON_CONNECTOR_FULLMOUNTING_HOLES  [EDISON_DAUGHTER]  182.63,169.16 0 bottom
U86  EDISON_CONNECTOR_FULLHEADER  [DF40C-70DP-0.4(51)]  179.33,181.53 90 bottom
U87  MCP73831  [SOT23-5]  162.31,204.72 180 top
U88  EDISON_CONNECTOR_FULLMOUNTING_HOLES  [EDISON_DAUGHTER]  215.65,169.16 0 bottom
U89  EDISON_CONNECTOR_FULLHEADER  [DF40C-70DP-0.4(51)]  212.35,181.53 90 bottom
U90  MCP73831  [SOT23-5]  195.33,204.72 180 top
U91  EDISON_CONNECTOR_FULLMOUNTING_HOLES  [EDISON_DAUGHTER]  248.67,169.16 0 bottom
U92  EDISON_CONNECTOR_FULLHEADER  [DF40C-70DP-0.4(51)]  245.37,181.53 90 bottom
U93  MCP73831  [SOT23-5]  228.35,204.72 180 top
U94  EDISON_CONNECTOR_FULLMOUNTING_HOLES  [EDISON_DAUGHTER]  281.69,169.16 0 bottom
U95  EDISON_CONNECTOR_FULLHEADER  [DF40C-70DP-0.4(51)]  278.39,181.53 90 bottom
U96  MCP73831  [SOT23-5]  261.37,204.72 180 top

## Library data of the parts
C1-C64 = SparkFun-Capacitors; PROD_ID: CAP-08280
D1 D3 D5 D7 D9 D11 D13 D15 D17 D19 D21 D23 D25 D27 D29 D31 D33 D35 D37 D39 D41 D43 D45 D47 D49 D51 D53 D55 D57 D59 D61 D63 = SparkFun-LED; PROD_ID: DIO-00819
D2 D4 D6 D8 D10 D12 D14 D16 D18 D20 D22 D24 D26 D28 D30 D32 D34 D36 D38 D40 D42 D44 D46 D48 D50 D52 D54 D56 D58 D60 D62 D64 = SparkFun-LED; PROD_ID: DIO-08575
E$1 E$2 E$9 E$10 E$15 E$16 E$21 E$22 = SparkFun-Retired
E$3-E$8 E$11-E$14 E$17-E$20 E$23 E$24 FID1-FID128 LOGO1-LOGO128 = SparkFun-Aesthetics
JP1 JP2 JP5 JP7 JP9 JP11 JP13 JP15 JP17 JP19 JP21 JP23 JP25 JP27 JP29 JP31 JP33 JP35 JP37 JP39 JP41 JP43 JP45 JP47 JP49 JP51 JP53 JP55 JP57 JP59 JP61 JP63 = SparkFun-Connectors; PROD_ID: CONN-11752
JP3 JP4 JP6 JP8 JP10 JP12 JP14 JP16 JP18 JP20 JP22 JP24 JP26 JP28 JP30 JP32 JP34 JP36 JP38 JP40 JP42 JP44 JP46 JP48 JP50 JP52 JP54 JP56 JP58 JP60 JP62 JP64 = SparkFun-Connectors
R1 R4 R7 R10 R13 R16 R19 R22 R25 R28 R31 R34 R37 R40 R43 R46 R49 R52 R55 R58 R61 R64 R67 R70 R73 R76 R79 R82 R85 R88 R91 R94 = SparkFun-Resistors; PROD_ID: RES-08296
R2 R5 R8 R11 R14 R17 R20 R23 R26 R29 R32 R35 R38 R41 R44 R47 R50 R53 R56 R59 R62 R65 R68 R71 R74 R77 R80 R83 R86 R89 R92 R95 = SparkFun-Resistors; PROD_ID: RES-00818
R3 R6 R9 R12 R15 R18 R21 R24 R27 R30 R33 R36 R39 R42 R45 R48 R51 R54 R57 R60 R63 R66 R69 R72 R75 R78 R81 R84 R87 R90 R93 R96 = SparkFun-Resistors; PROD_ID: RES-07856
SJ1-SJ32 = SparkFun-Passives
SW1-SW32 = SparkFun-Electromechanical; PROD_ID: SWCH-10651
U1 U6 U9 U12 U15 U18 U21 U24 U27 U30 U33 U36 U39 U42 U45 U48 U51 U54 U57 U60 U63 U66 U69 U72 U75 U78 U81 U84 U87 U90 U93 U96 = SparkFun-PowerIC; PROD_ID: IC-09995
U2-U5 U7 U8 U10 U11 U13 U14 U16 U17 U19 U20 U22 U23 U25 U26 U28 U29 U31 U32 U34 U35 U37 U38 U40 U41 U43 U44 U46 U47 U49 U50 U52 U53 U55 U56 U58 U59 U61 U62 U64 U65 U67 U68 U70 U71 U73 U74 U76 U77 U79 U80 U82 U83 U85 U86 U88 U89 U91 U92 U94 U95 = Edison

## Nets
1.8V: U2.12 U3.12
1.8V1: U4.12 U5.12
1.8V2: U7.12 U8.12
1.8V3: U10.12 U11.12
1.8V4: U13.12 U14.12
1.8V5: U16.12 U17.12
1.8V6: U19.12 U20.12
1.8V7: U22.12 U23.12
1.8V8: U25.12 U26.12
1.8V9: U28.12 U29.12
1.8V10: U31.12 U32.12
1.8V11: U34.12 U35.12
1.8V12: U37.12 U38.12
1.8V13: U40.12 U41.12
1.8V14: U43.12 U44.12
1.8V15: U46.12 U47.12
1.8V16: U49.12 U50.12
1.8V17: U52.12 U53.12
1.8V18: U55.12 U56.12
1.8V19: U58.12 U59.12
1.8V20: U61.12 U62.12
1.8V21: U64.12 U65.12
1.8V22: U67.12 U68.12
1.8V23: U70.12 U71.12
1.8V24: U73.12 U74.12
1.8V25: U76.12 U77.12
1.8V26: U79.12 U80.12
1.8V27: U82.12 U83.12
1.8V28: U85.12 U86.12
1.8V29: U88.12 U89.12
1.8V30: U91.12 U92.12
1.8V31: U94.12 U95.12
3.3V: U2.8 U2.10 U3.8 U3.10
3.3V1: U4.8 U4.10 U5.8 U5.10
3.3V2: U7.8 U7.10 U8.8 U8.10
3.3V3: U10.8 U10.10 U11.8 U11.10